# EAGLE board lamloei_node32s3wroom_cp2102_smp_4layers (EAGLE 7.7.0), part 1 of 7
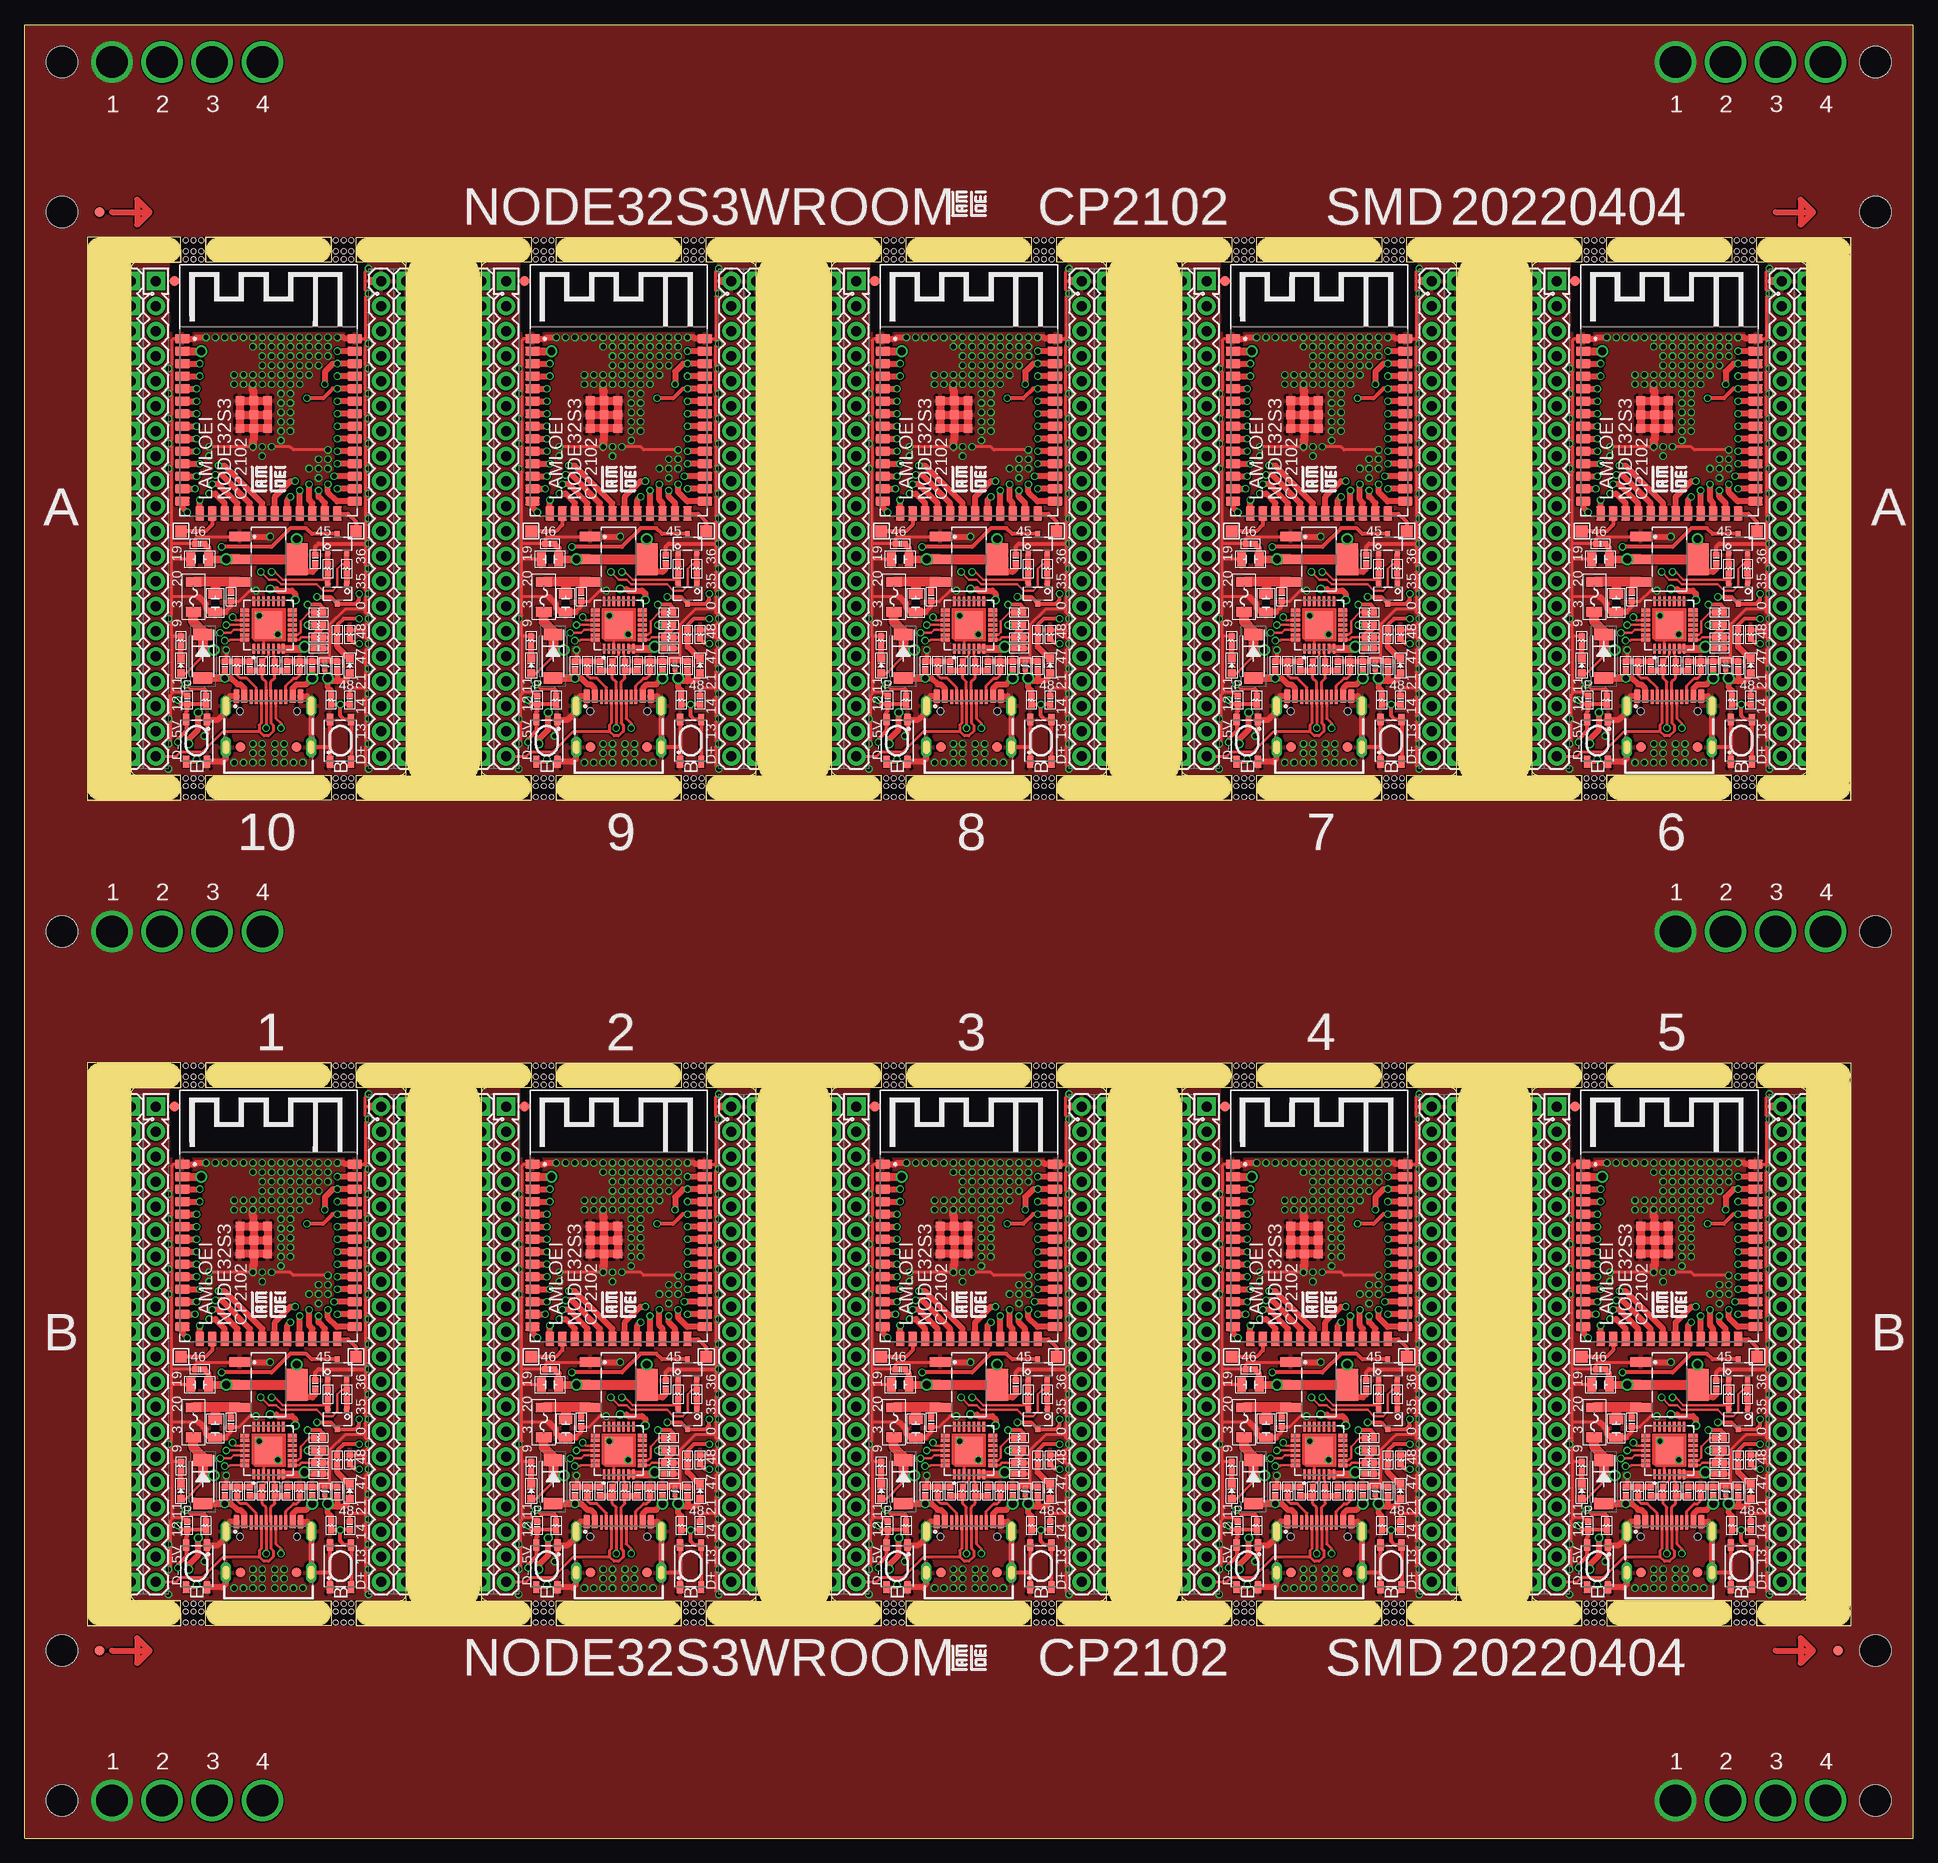
[diagram p0: board, top side]
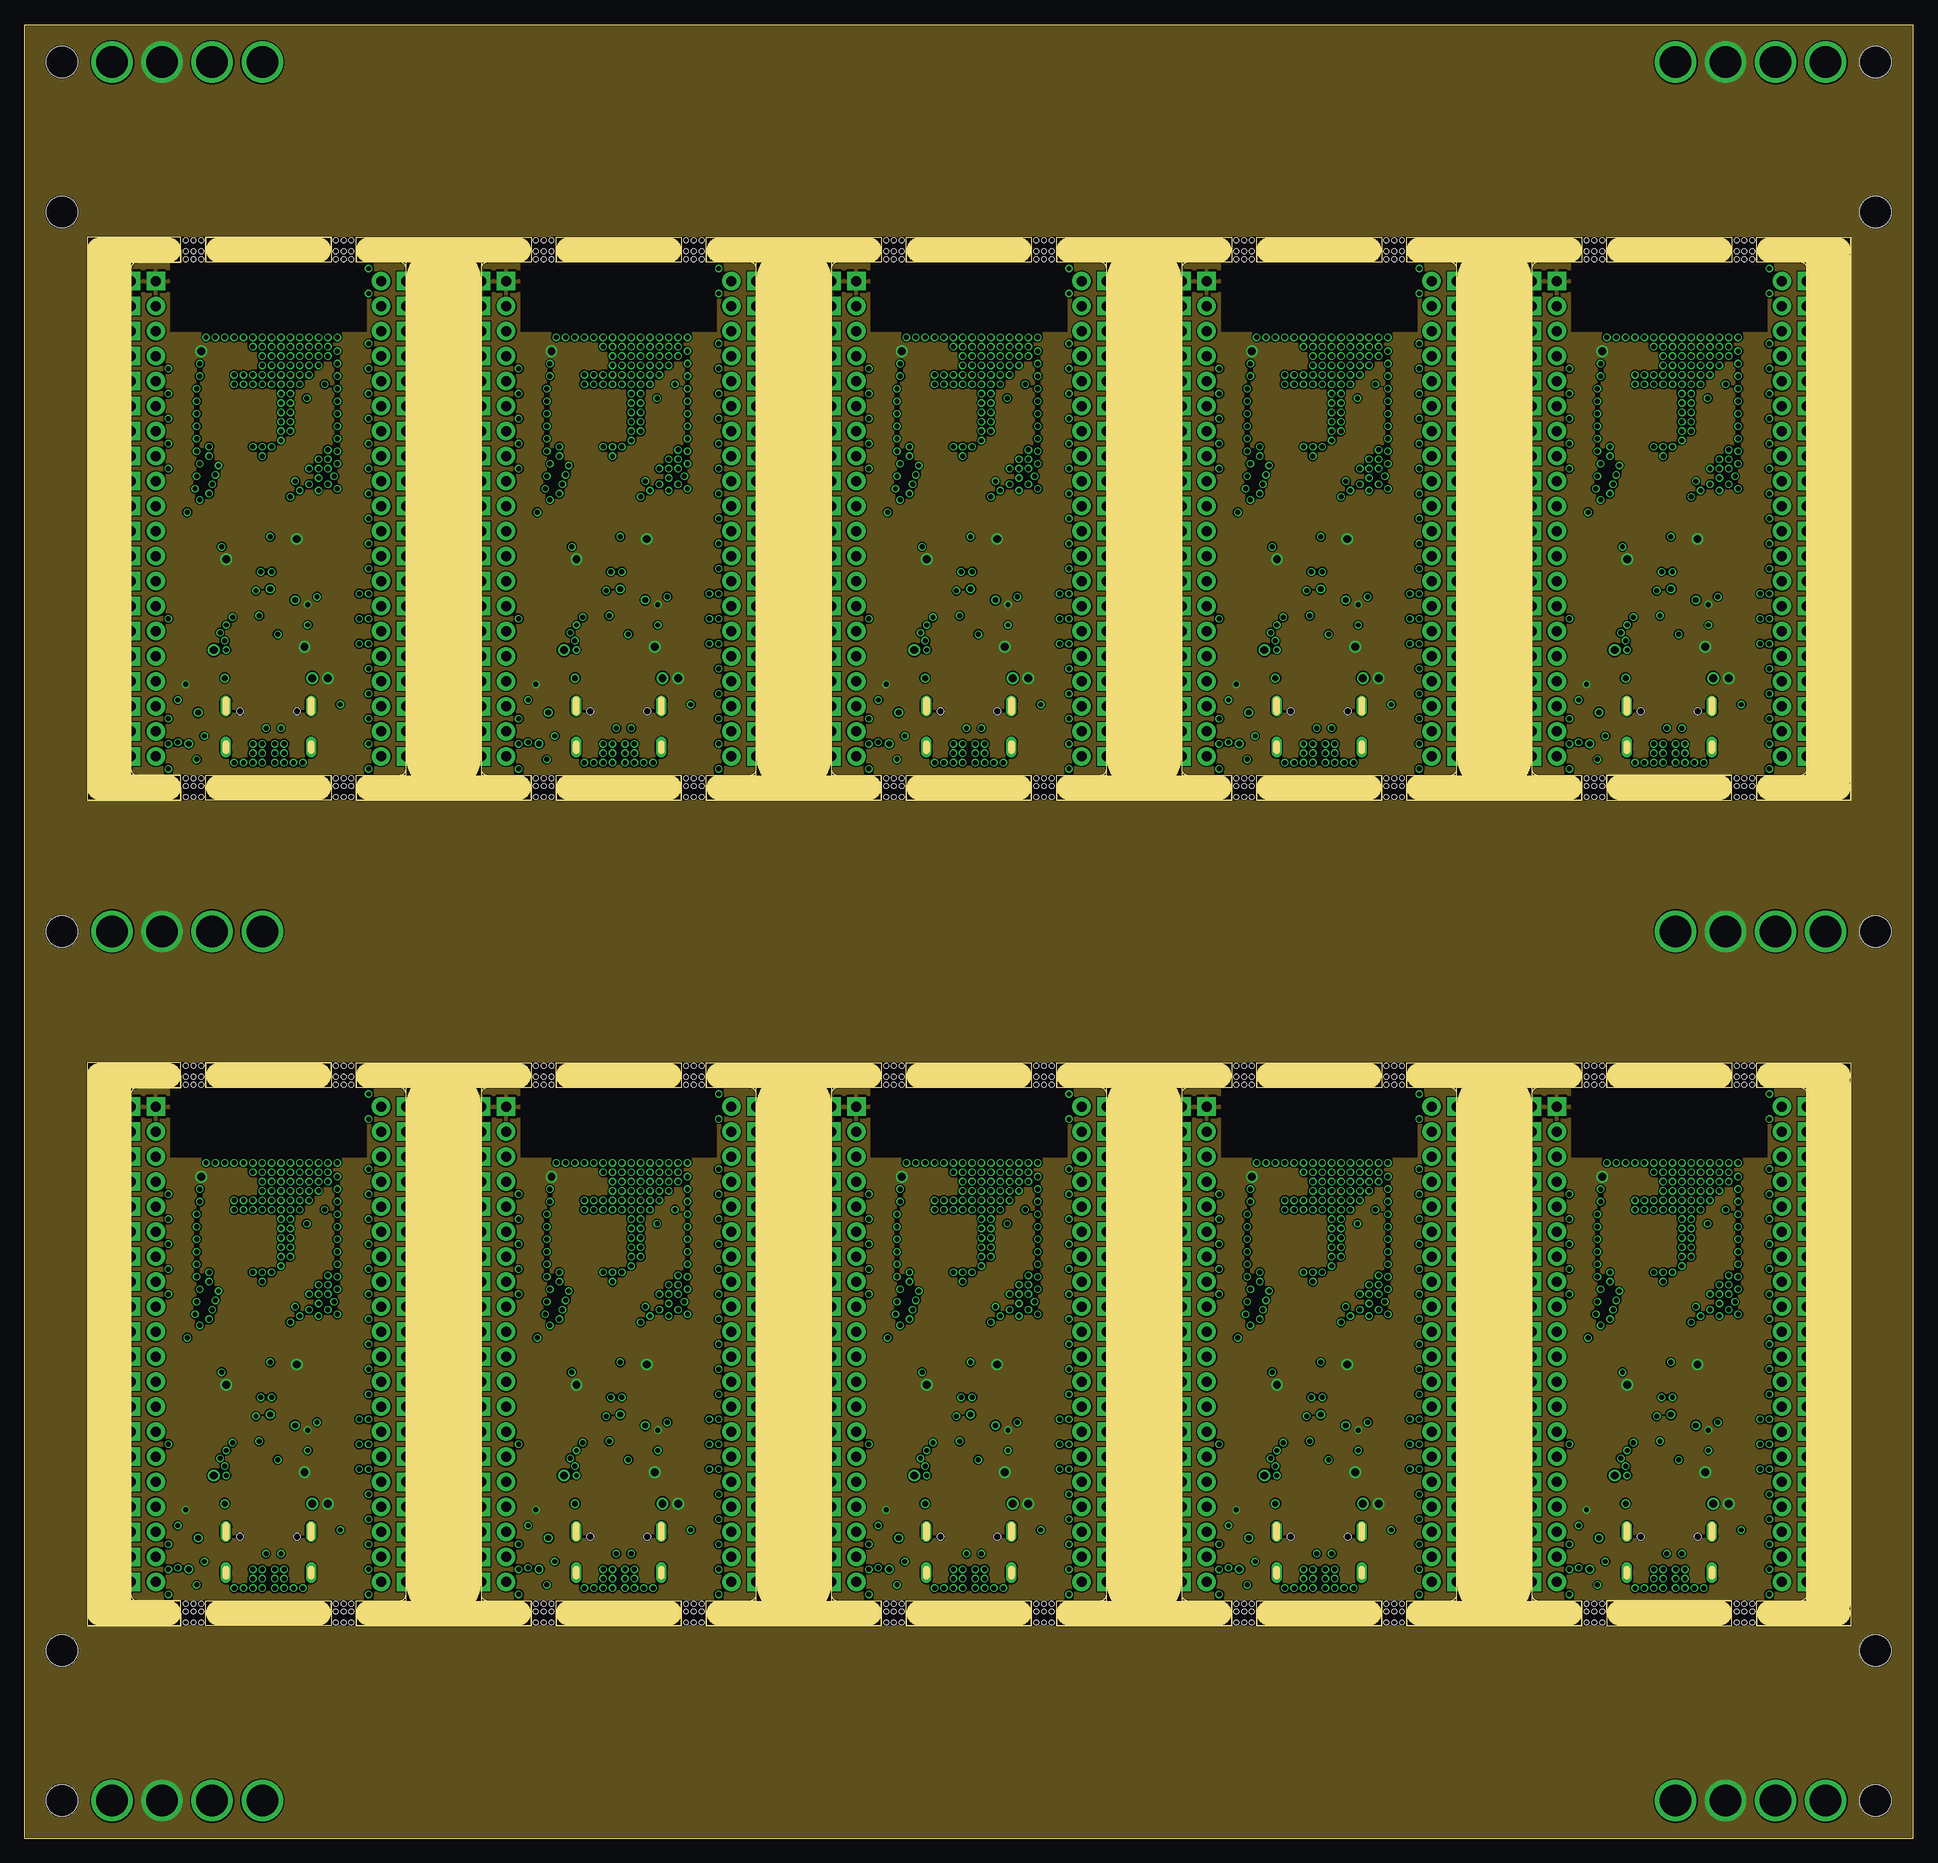
[diagram p1: board, inner layer Route2]
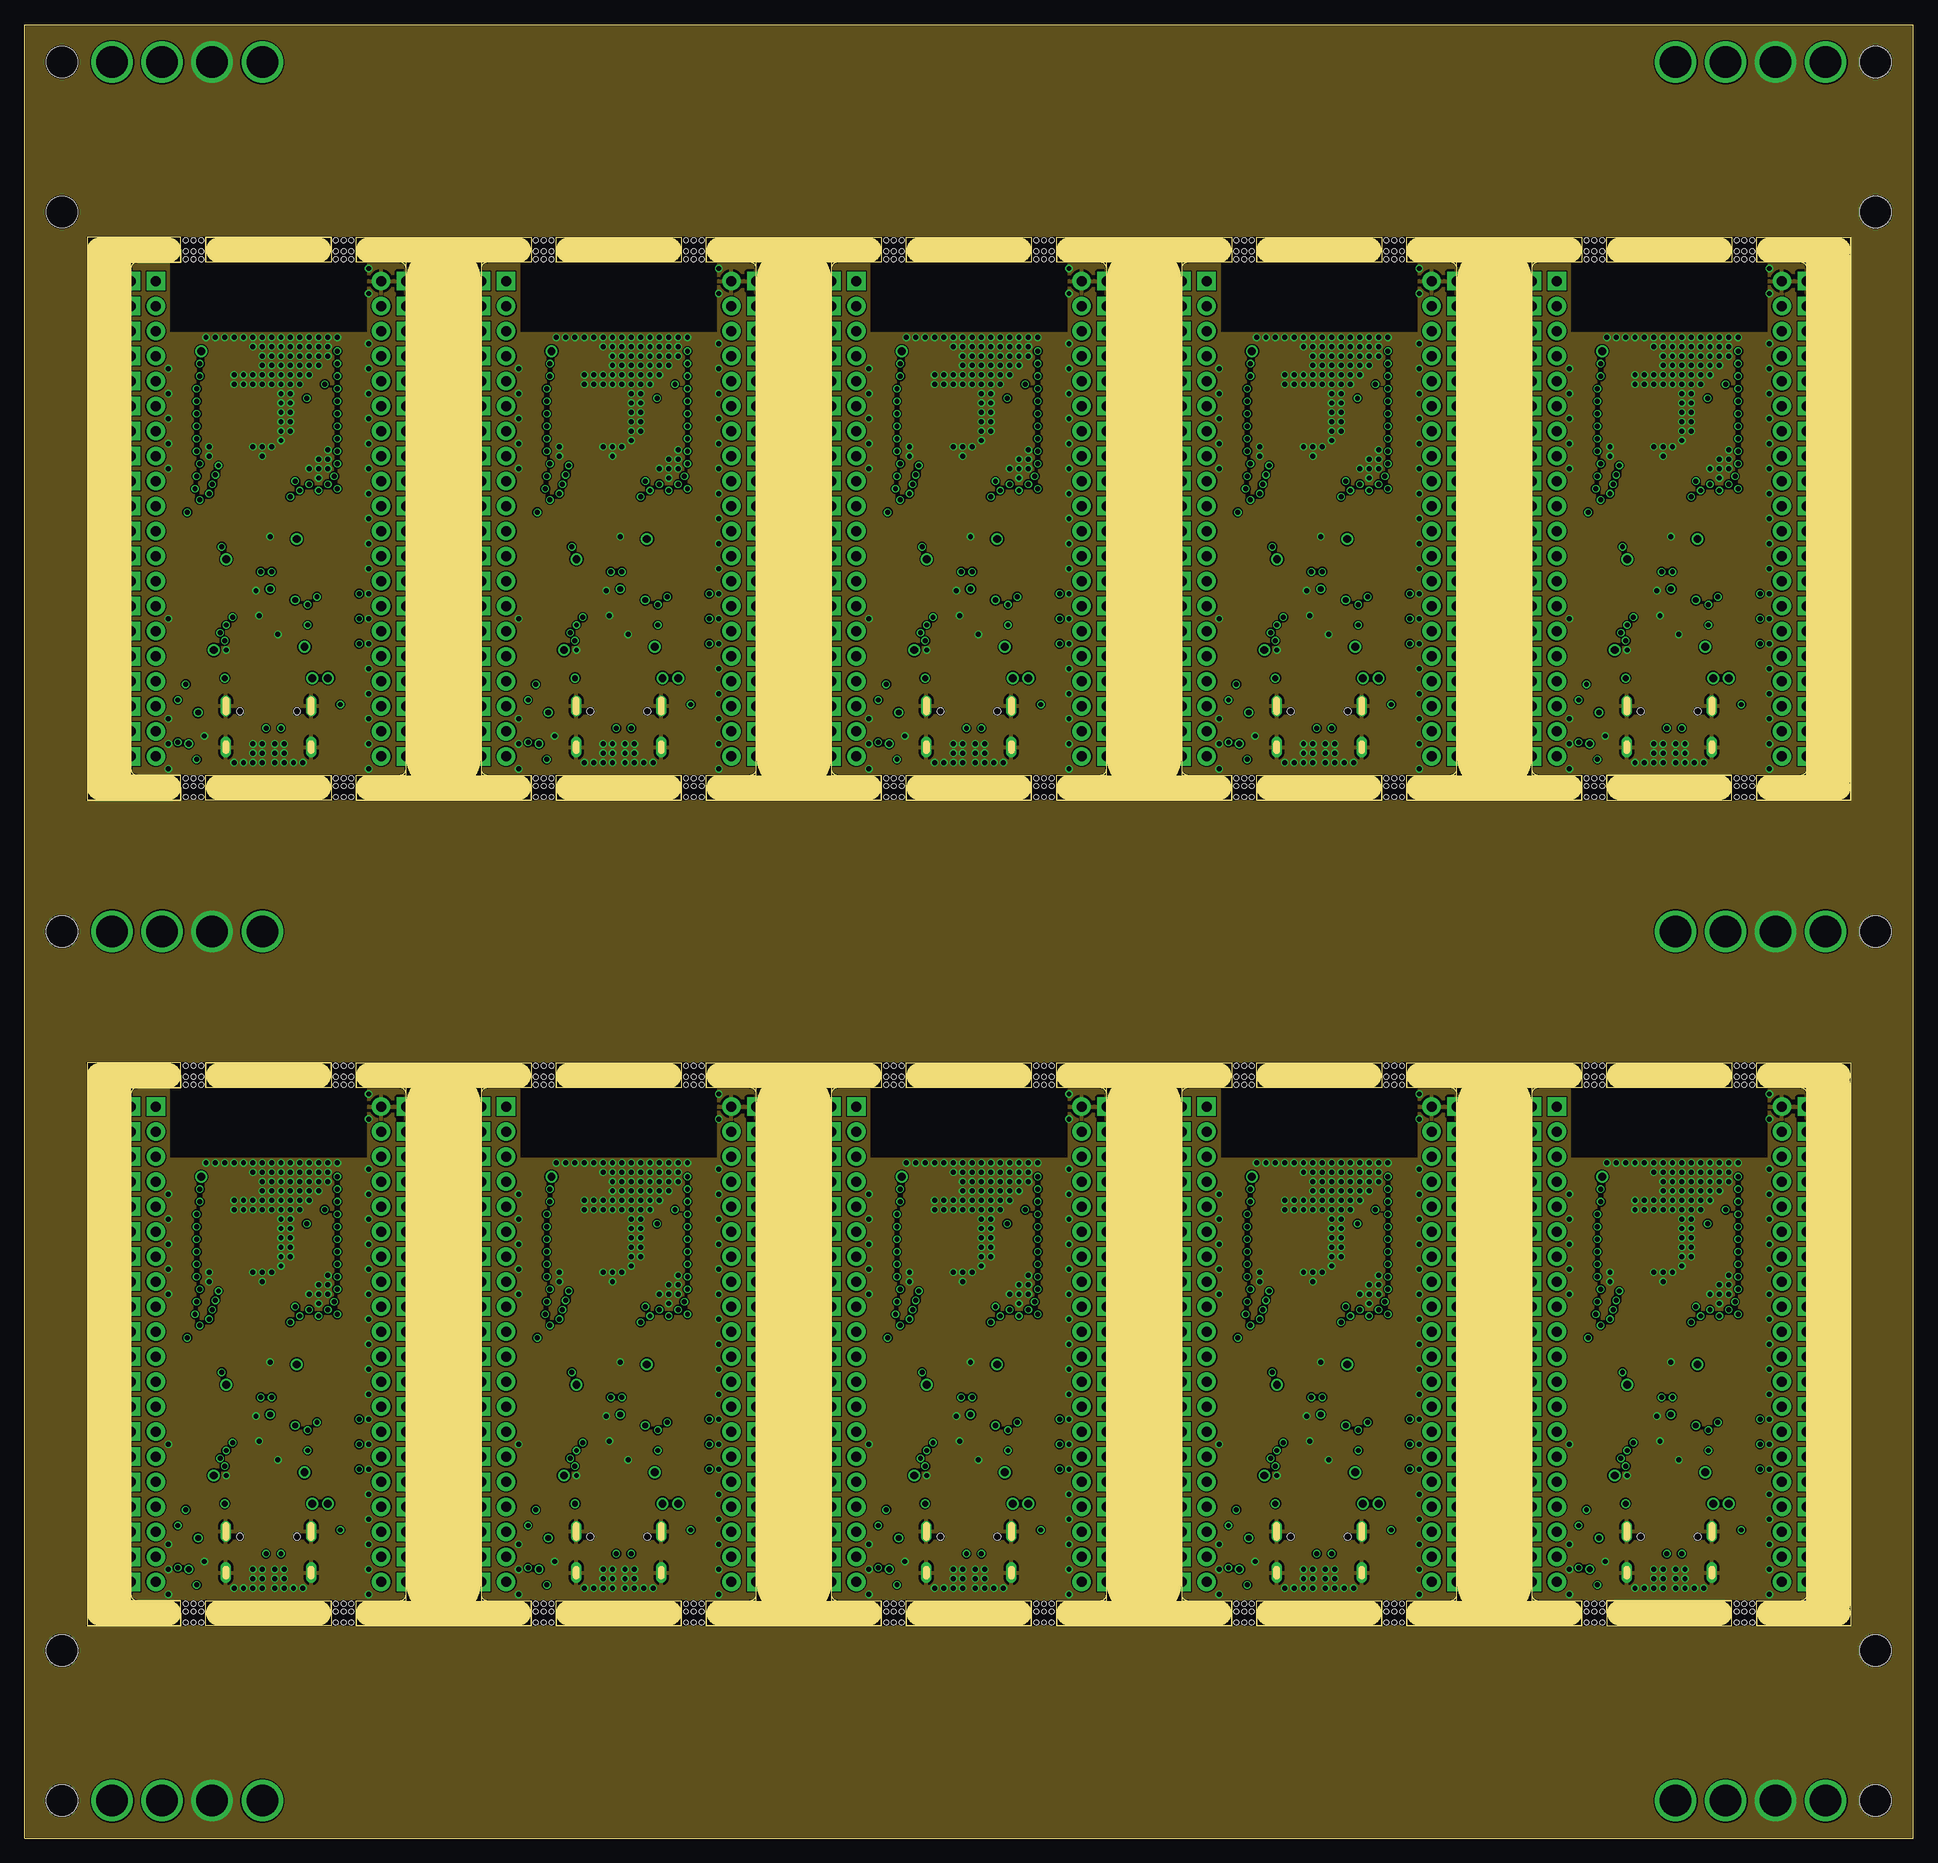
[diagram p2: board, inner layer Route15]
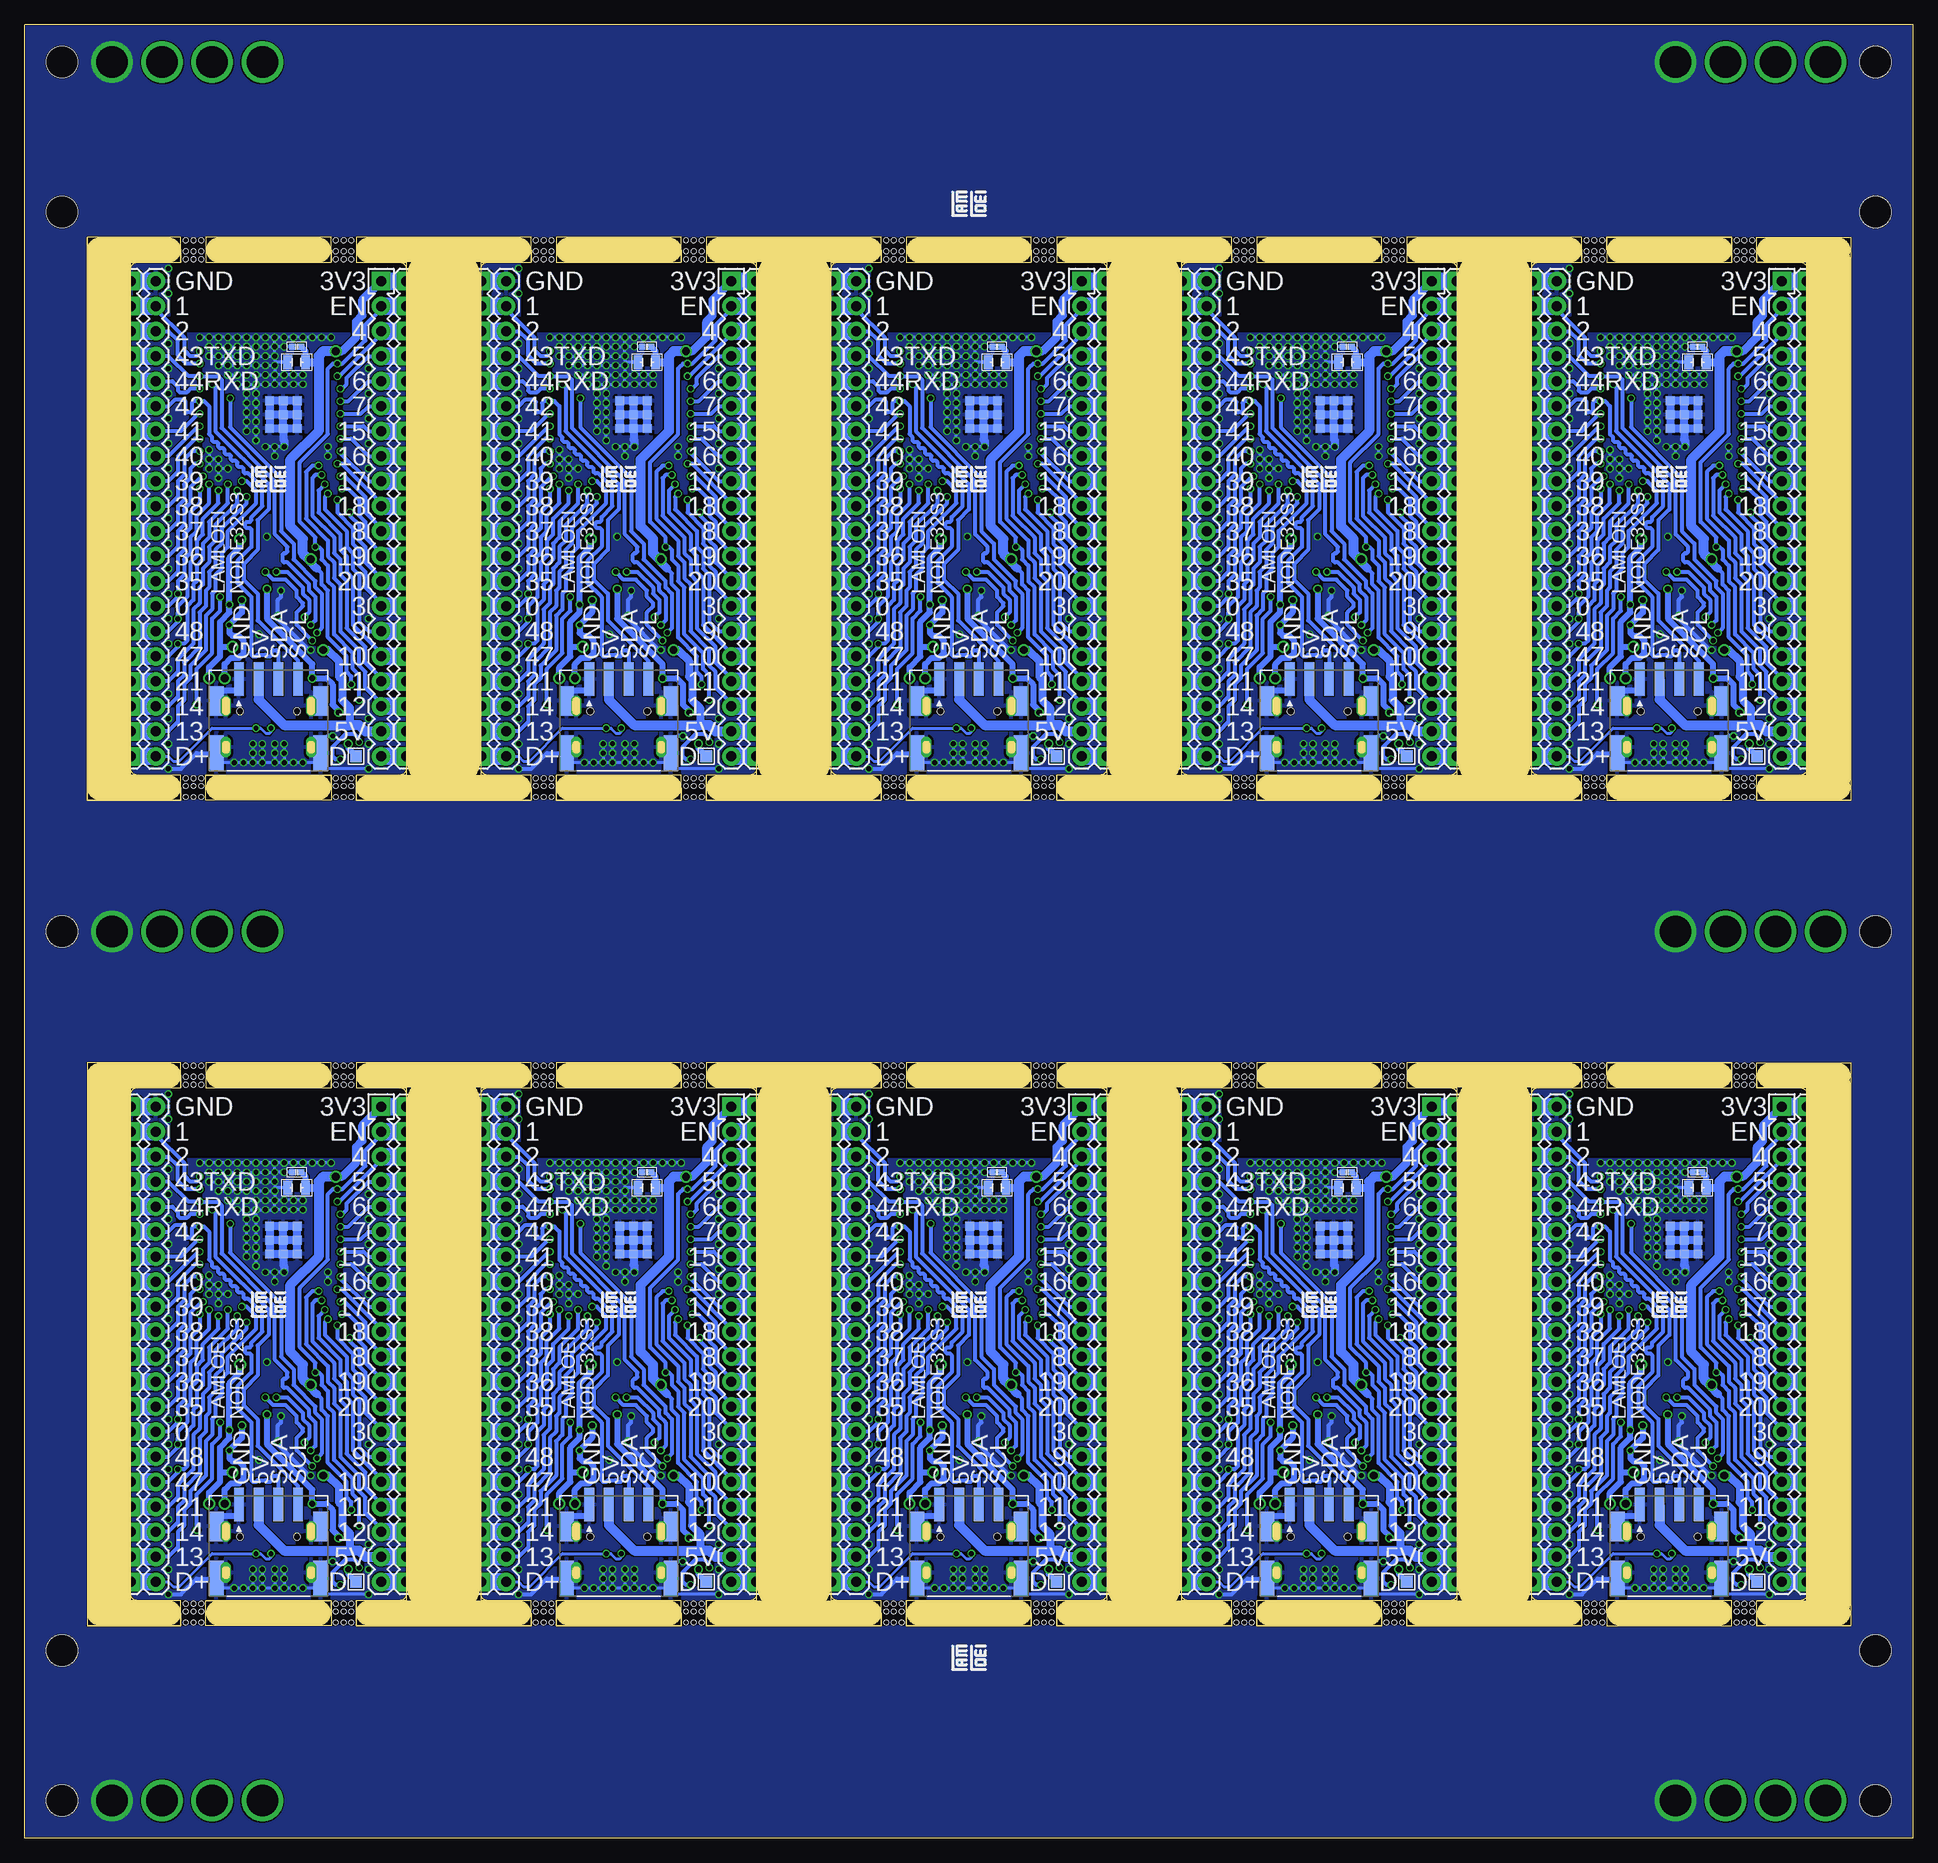
[diagram p3: board, bottom side, seen from below]

Size 191.77 x 184.15 mm. Coordinates in mm from the lower left corner, seen from the top.
Outline: 332 segments
Copper layers (1*2*15*16): Top 0.035559375mm / dielectric 0.17018125mm / Route2 0.01778125mm / dielectric 47mil / Route15 0.01778125mm / dielectric 0.17018125mm / Bottom 0.035559375mm
Design rules "jlcpcb-4-layer": minimum track width 5mil, minimum drill 0.2mm, track to track 0.126490625mm, track to pad 0.126490625mm, pad to pad 0.126490625mm, via to via 0.126490625mm, smd to smd 0mil, copper to edge 0.1mm, drill to drill 5mil, minimum pad ring 4mil, minimum via ring 4mil, stop-mask expansion 3mil, vias tented up to drill 100mil, thermal gap 10mil
Holes 0.5 mm at 16.35,78.42 17.14,78.42 17.94,78.42 31.59,78.42 32.38,78.42 33.18,78.42 17.14,21.91 16.35,21.91 17.94,21.91 31.59,21.91 32.38,21.91 33.18,21.91 51.91,78.42 52.7,78.42 53.5,78.42 67.15,78.42 67.94,78.42 68.74,78.42 52.7,21.91 51.91,21.91 53.5,21.91 67.15,21.91 67.94,21.91 68.74,21.91 88.27,21.91 87.47,21.91 89.06,21.91 102.71,21.91 103.5,21.91 104.3,21.91 87.47,78.42 88.27,78.42 89.06,78.42 102.71,78.42 103.5,78.42 104.3,78.42 123.03,78.42 123.83,78.42 124.62,78.42 138.27,78.42 139.06,78.42 139.86,78.42 158.59,78.42 159.38,78.42 160.18,78.42 173.83,78.42 174.62,78.42 175.42,78.42 123.83,21.91 123.03,21.91 124.62,21.91 138.27,21.91 139.06,21.91 139.86,21.91 159.38,21.91 158.59,21.91 160.18,21.91 173.83,21.91 174.62,21.91 175.42,21.91 17.14,105.73 16.35,105.73 17.94,105.73 31.59,105.73 32.38,105.73 33.18,105.73 52.7,105.73 51.91,105.73 53.5,105.73 67.15,105.73 67.94,105.73 68.74,105.73 88.27,105.73 87.47,105.73 89.06,105.73 102.71,105.73 103.5,105.73 104.3,105.73 123.83,105.73 123.03,105.73 124.62,105.73 138.27,105.73 139.06,105.73 139.86,105.73 159.38,105.73 158.59,105.73 160.18,105.73 173.83,105.73 174.62,105.73 175.42,105.73 16.35,162.24 17.14,162.24 17.94,162.24 31.59,162.24 32.38,162.24 33.18,162.24 51.91,162.24 52.7,162.24 53.5,162.24 67.15,162.24 67.94,162.24 68.74,162.24 87.47,162.24 88.27,162.24 89.06,162.24 102.71,162.24 103.5,162.24 104.3,162.24 123.03,162.24 123.83,162.24 124.62,162.24 138.27,162.24 139.06,162.24 139.86,162.24 158.59,162.24 159.38,162.24 160.18,162.24 173.83,162.24 174.62,162.24 175.42,162.24 17.14,23.81 32.38,23.81 17.14,76.52 32.38,76.52 16.35,23.81 17.94,23.81 31.59,23.81 33.18,23.81 33.18,76.52 31.59,76.52 16.35,76.52 17.94,76.52 16.35,77.31 17.14,77.31 17.94,77.31 31.59,77.31 32.38,77.31 33.18,77.31 31.59,23.02 32.38,23.02 33.18,23.02 16.35,23.02 17.14,23.02 17.94,23.02 52.7,23.81 67.94,23.81 52.7,76.52 67.94,76.52 51.91,23.81 53.5,23.81 67.15,23.81 68.74,23.81 68.74,76.52 67.15,76.52 51.91,76.52 53.5,76.52 51.91,77.31 52.7,77.31 53.5,77.31 67.15,77.31 67.94,77.31 68.74,77.31 67.15,23.02 67.94,23.02 68.74,23.02 51.91,23.02 52.7,23.02 53.5,23.02 88.27,23.81 103.5,23.81 88.27,76.52 103.5,76.52 87.47,23.81 89.06,23.81 102.71,23.81 104.3,23.81 104.3,76.52 102.71,76.52 87.47,76.52 89.06,76.52 87.47,77.31 88.27,77.31 89.06,77.31 102.71,77.31 103.5,77.31 104.3,77.31 102.71,23.02 103.5,23.02 104.3,23.02 87.47,23.02 88.27,23.02 89.06,23.02 123.83,23.81 139.06,23.81 123.83,76.52 139.06,76.52 123.03,23.81 124.62,23.81 138.27,23.81 139.86,23.81 139.86,76.52 138.27,76.52 123.03,76.52 124.62,76.52 123.03,77.31 123.83,77.31 124.62,77.31 138.27,77.31 139.06,77.31 139.86,77.31 138.27,23.02 139.06,23.02 139.86,23.02 123.03,23.02 123.83,23.02 124.62,23.02 159.38,23.81 174.62,23.81 159.38,76.52 174.62,76.52 158.59,23.81 160.18,23.81 173.83,23.81 175.42,23.81 175.42,76.52 173.83,76.52 158.59,76.52 160.18,76.52 158.59,77.31 159.38,77.31 160.18,77.31 173.83,77.31 174.62,77.31 175.42,77.31 173.83,23.02 174.62,23.02 175.42,23.02 158.59,23.02 159.38,23.02 160.18,23.02 159.38,107.63 174.62,107.63 159.38,160.34 174.62,160.34 158.59,107.63 160.18,107.63 173.83,107.63 175.42,107.63 175.42,160.34 173.83,160.34 158.59,160.34 160.18,160.34 158.59,161.13 159.38,161.13 160.18,161.13 173.83,161.13 174.62,161.13 175.42,161.13 173.83,106.84 174.62,106.84 175.42,106.84 158.59,106.84 159.38,106.84 160.18,106.84 123.83,107.63 139.06,107.63 123.83,160.34 139.06,160.34 123.03,107.63 124.62,107.63 138.27,107.63 139.86,107.63 139.86,160.34 138.27,160.34 123.03,160.34 124.62,160.34 123.03,161.13 123.83,161.13 124.62,161.13 138.27,161.13 139.06,161.13 139.86,161.13 138.27,106.84 139.06,106.84 139.86,106.84 123.03,106.84 123.83,106.84 124.62,106.84 88.27,107.63 103.5,107.63 88.27,160.34 103.5,160.34 87.47,107.63 89.06,107.63 102.71,107.63 104.3,107.63 104.3,160.34 102.71,160.34 87.47,160.34 89.06,160.34 87.47,161.13 88.27,161.13 89.06,161.13 102.71,161.13 103.5,161.13 104.3,161.13 102.71,106.84 103.5,106.84 104.3,106.84 87.47,106.84 88.27,106.84 89.06,106.84 52.7,107.63 67.94,107.63 52.7,160.34 67.94,160.34 51.91,107.63 53.5,107.63 67.15,107.63 68.74,107.63 68.74,160.34 67.15,160.34 51.91,160.34 53.5,160.34 51.91,161.13 52.7,161.13 53.5,161.13 67.15,161.13 67.94,161.13 68.74,161.13 67.15,106.84 67.94,106.84 68.74,106.84 51.91,106.84 52.7,106.84 53.5,106.84 17.14,107.63 32.38,107.63 17.14,160.34 32.38,160.34 16.35,107.63 17.94,107.63 31.59,107.63 33.18,107.63 33.18,160.34 31.59,160.34 16.35,160.34 17.94,160.34 16.35,161.13 17.14,161.13 17.94,161.13 31.59,161.13 32.38,161.13 33.18,161.13 31.59,106.84 32.38,106.84 33.18,106.84 16.35,106.84 17.14,106.84 17.94,106.84
Holes 3.2 mm at 3.81,165.1 187.96,165.1 187.96,19.05 3.81,19.05 3.81,3.81 187.96,3.81 3.81,180.34 187.96,180.34 187.96,92.08 3.81,92.08
Milling: 264 lines

## Footprints (pad centres in the part's own frame; a part is rotated, then mirrored left to right if it is on the bottom)
GRM155R70J105KA12D = smd 0.62 x 0.62: 1 -0.45,0; 2 0.45,0
GCM155R71H104KE02D = smd 0.62 x 0.62: 1 -0.45,0; 2 0.45,0
GCM1555C1H470JA16D = smd 0.62 x 0.62: 1 -0.45,0; 2 0.45,0
GCM21BR71H105KA03L = smd 0.9 x 1.4: 1 -0.9,0; 2 0.9,0
PMEG4050EP,115 = smd 1.2 x 1.9: 1 -2.2,0; 2 2.2,0
MF-NSMF050-2 = smd 1 x 1.6: 1 -1.5,0; 2 1.5,0
HEADER-120 = drill 1.016 pad 1.88 square: P1 24.13,0 | drill 1.016 pad 1.88: P2 21.59,0; P3 19.05,0; P4 16.51,0; P5 13.97,0; P6 11.43,0; P7 8.89,0; P8 6.35,0; P9 3.81,0; P10 1.27,0; P11 -1.27,0; P12 -3.81,0; P13 -6.35,0; P14 -8.89,0; P15 -11.43,0; P16 -13.97,0; P17 -16.51,0; P18 -19.05,0; P19 -21.59,0; P20 -24.13,0
HEADER-120' = drill 1.016 pad 1.88: P1 24.13,0; P2 21.59,0; P3 19.05,0; P4 16.51,0; P5 13.97,0; P6 11.43,0; P7 8.89,0; P8 6.35,0; P9 3.81,0; P10 1.27,0; P11 -1.27,0; P12 -3.81,0; P13 -6.35,0; P14 -8.89,0; P15 -11.43,0; P16 -13.97,0; P17 -16.51,0; P18 -19.05,0; P19 -21.59,0; P20 -24.13,0
HEADER-101-SMD = smd 1.2 x 1.2: P$1 0,0
HEADER-120'' = drill 1.016 pad 1.88 square: P1 24.13,0; P2 21.59,0; P3 19.05,0; P4 16.51,0; P5 13.97,0; P6 11.43,0; P7 8.89,0; P8 6.35,0; P9 3.81,0; P10 1.27,0; P11 -1.27,0; P12 -3.81,0; P13 -6.35,0; P14 -8.89,0; P15 -11.43,0; P16 -13.97,0; P17 -16.51,0; P18 -19.05,0; P19 -21.59,0; P20 -24.13,0
A2012WR-S-4P = smd 1 x 3.4: 1 -3,3.7; 2 -1,3.7; 3 1,3.7; 4 3,3.7 | smd 1.5 x 3.6: G1 -5.3,-3.8; G2 5.3,-3.8 | smd 1.5 x 3: G3 -5.3,1.5; G4 5.3,1.5
19-217BHC-ZL1M2RY3T = smd 0.8 x 0.8: 1 -0.75,0; 2 0.75,0
19-213/Y2C-CQ2R2L/3T(CY) = smd 0.8 x 0.8: 1 -0.75,0; 2 0.75,0
BC847B,215 = smd 0.6 x 0.5: B 1,-0.95; C -1,0; E 1,0.95
R0402 = smd 0.62 x 0.62: 1 -0.45,0; 2 0.45,0
K2-1808SN-A4SW-01 = smd 1.2 x 0.65: 1 -2.15,1.075; 2 2.15,1.075; 3 -2.15,-1.075; 4 2.15,-1.075
LXES15AAA1-153 = smd 0.4 x 0.5: 1 -0.4,0; 2 0.4,0
ESP32-S3-WROOM = smd 0.9 x 1.5: 1 -5.26,-8.75; 2 -3.99,-8.75; 3 -2.72,-8.75; 4 -1.45,-8.75; 5 -0.18,-8.75; 6 1.09,-8.75; 7 2.36,-8.75; 8 3.63,-8.75; 9 4.9,-8.75; 10 6.17,-8.75; 11 7.44,-8.75; 12 8.71,-8.75; 13 9.98,-8.75; 14 11.25,-8.75; 27 11.25,8.75; 28 9.98,8.75; 29 8.71,8.75; 30 7.44,8.75; 31 6.17,8.75; 32 4.9,8.75; 33 3.63,8.75; 34 2.36,8.75; 35 1.09,8.75; 36 -0.18,8.75; 37 -1.45,8.75; 38 -2.72,8.75; 39 -3.99,8.75; 40 -5.26,8.75 | smd 0.9 x 0.9: 1.1 1.06,-2.9; 1.2 1.06,-1.5; 1.3 1.06,-0.1; 1.4 2.46,-2.9; 1.5 2.46,-1.5; 1.6 2.46,-0.1; 1.7 3.86,-2.9; 1.8 3.86,-1.5; 1.9 3.86,-0.1 | smd 0.9 x 0.9 bottom: 1.10 1.06,-2.9; 1.11 1.06,-1.5; 1.12 1.06,-0.1; 1.13 2.46,-2.9; 1.14 2.46,-1.5; 1.15 2.46,-0.1; 1.16 3.86,-2.9; 1.17 3.86,-1.5; 1.18 3.86,-0.1 | smd 1.5 x 0.9: 15 12.5,-6.985; 16 12.5,-5.715; 17 12.5,-4.445; 18 12.5,-3.175; 19 12.5,-1.905; 20 12.5,-0.635; 21 12.5,0.635; 22 12.5,1.905; 23 12.5,3.175; 24 12.5,4.445; 25 12.5,5.715; 26 12.5,6.985
CP2102N-A02-GQFN28R = smd 0.95 x 0.29: 1 -2.4,1.5; 2 -2.4,1; 3 -2.4,0.5; 4 -2.4,0; 5 -2.4,-0.5; 6 -2.4,-1; 7 -2.4,-1.5; 15 2.4,-1.5; 16 2.4,-1; 17 2.4,-0.5; 18 2.4,0; 19 2.4,0.5; 20 2.4,1; 21 2.4,1.5 | smd 0.29 x 0.95: 8 -1.5,-2.4; 9 -1,-2.4; 10 -0.5,-2.4; 11 0,-2.4; 12 0.5,-2.4; 13 1,-2.4; 14 1.5,-2.4; 22 1.5,2.4; 23 1,2.4; 24 0.5,2.4; 25 0,2.4; 26 -0.5,2.4; 27 -1,2.4; 28 -1.5,2.4 | smd 2.8 x 2.8: 29 0,0
LM1117MPX-3.3/NOPB = smd 2.15 x 0.95: 1 2.9,-2.3; 2 2.9,0; 3 2.9,2.3 | smd 2.15 x 3.25: 4 -2.9,0
TYPE-C-31-M-12 = smd 0.6 x 1.3: A1B12 3.25,-3.56; A4B9 2.45,-3.56; B1A12 -3.25,-3.56; B4A9 -2.45,-3.56 | smd 0.3 x 1.45: A5 1.25,-3.485; A6 0.25,-3.485; A7 -0.25,-3.485; A8 -1.25,-3.485; B5 -1.75,-3.485; B6 -0.75,-3.485; B7 0.75,-3.485; B8 1.75,-3.485 | drill 0.65 pad 1.05 long: S1 4.32,-2.57; S2 -4.32,-2.57; S3 4.32,1.61; S4 -4.32,1.61 | hole 0.7: 2.89,-2.04; -2.89,-2.04
FIDUCIAL-1X2 = smd 1 x 1: 1 0,0

## Placement (x,y rotation side)
C1  1u  [GRM155R70J105KA12D]  16.51,31.75 270 top
C2  100n  [GCM155R71H104KE02D]  33.02,31.75 270 top
C3  100n  [GCM155R71H104KE02D]  20.32,35.24 270 top
C4  47p  [GCM1555C1H470JA16D]  22.86,35.24 270 top
C5  47p  [GCM1555C1H470JA16D]  26.67,35.24 270 top
C6  100n  [GCM155R71H104KE02D]  29.21,35.24 270 top
C7  100n  [GCM155R71H104KE02D]  31.75,35.24 270 top
C8  100n  [GCM155R71H104KE02D]  29.84,36.99 180 top
C9  22u  [GCM21BR71H105KA03L]  19.37,41.59 90 top
C10  100n  [GCM155R71H104KE02D]  20.95,42.23 90 top
C11  100n  [GCM155R71H104KE02D]  29.53,46.04 270 top
C12  22u  [GCM21BR71H105KA03L]  17.78,46.04 0 top
C13  100n  [GCM155R71H104KE02D]  17.78,47.62 0 top
C14  47p  [GCM1555C1H470JA16D]  62.23,35.24 270 top
C15  47p  [GCM1555C1H470JA16D]  58.42,35.24 270 top
C16  100n  [GCM155R71H104KE02D]  55.88,35.24 270 top
C17  100n  [GCM155R71H104KE02D]  64.77,35.24 270 top
C18  100n  [GCM155R71H104KE02D]  53.34,47.62 0 top
C19  100n  [GCM155R71H104KE02D]  68.58,31.75 270 top
C20  1u  [GRM155R70J105KA12D]  52.07,31.75 270 top
C21  22u  [GCM21BR71H105KA03L]  54.93,41.59 90 top
C22  100n  [GCM155R71H104KE02D]  56.52,42.23 90 top
C23  22u  [GCM21BR71H105KA03L]  53.34,46.04 0 top
C24  100n  [GCM155R71H104KE02D]  67.31,35.24 270 top
C25  100n  [GCM155R71H104KE02D]  65.09,46.04 270 top
C26  100n  [GCM155R71H104KE02D]  65.41,36.99 180 top
C27  47p  [GCM1555C1H470JA16D]  97.79,35.24 270 top
C28  47p  [GCM1555C1H470JA16D]  93.98,35.24 270 top
C29  100n  [GCM155R71H104KE02D]  91.44,35.24 270 top
C30  100n  [GCM155R71H104KE02D]  100.33,35.24 270 top
C31  100n  [GCM155R71H104KE02D]  88.9,47.62 0 top
C32  100n  [GCM155R71H104KE02D]  104.14,31.75 270 top
C33  1u  [GRM155R70J105KA12D]  87.63,31.75 270 top
C34  22u  [GCM21BR71H105KA03L]  90.49,41.59 90 top
C35  100n  [GCM155R71H104KE02D]  92.08,42.23 90 top
C36  22u  [GCM21BR71H105KA03L]  88.9,46.04 0 top
C37  100n  [GCM155R71H104KE02D]  102.87,35.24 270 top
C38  100n  [GCM155R71H104KE02D]  100.65,46.04 270 top
C39  100n  [GCM155R71H104KE02D]  100.97,36.99 180 top
C40  47p  [GCM1555C1H470JA16D]  133.35,35.24 270 top
C41  47p  [GCM1555C1H470JA16D]  129.54,35.24 270 top
C42  100n  [GCM155R71H104KE02D]  127,35.24 270 top
C43  100n  [GCM155R71H104KE02D]  135.89,35.24 270 top
C44  100n  [GCM155R71H104KE02D]  124.46,47.62 0 top
C45  100n  [GCM155R71H104KE02D]  139.7,31.75 270 top
C46  1u  [GRM155R70J105KA12D]  123.19,31.75 270 top
C47  22u  [GCM21BR71H105KA03L]  126.05,41.59 90 top
C48  100n  [GCM155R71H104KE02D]  127.64,42.23 90 top
C49  22u  [GCM21BR71H105KA03L]  124.46,46.04 0 top
C50  100n  [GCM155R71H104KE02D]  138.43,35.24 270 top
C51  100n  [GCM155R71H104KE02D]  136.21,46.04 270 top
C52  100n  [GCM155R71H104KE02D]  136.53,36.99 180 top
C53  47p  [GCM1555C1H470JA16D]  168.91,35.24 270 top
C54  47p  [GCM1555C1H470JA16D]  165.1,35.24 270 top
C55  100n  [GCM155R71H104KE02D]  162.56,35.24 270 top
C56  100n  [GCM155R71H104KE02D]  171.45,35.24 270 top
C57  100n  [GCM155R71H104KE02D]  160.02,47.62 0 top
C58  100n  [GCM155R71H104KE02D]  175.26,31.75 270 top
C59  1u  [GRM155R70J105KA12D]  158.75,31.75 270 top
C60  22u  [GCM21BR71H105KA03L]  161.61,41.59 90 top
C61  100n  [GCM155R71H104KE02D]  163.19,42.23 90 top
C62  22u  [GCM21BR71H105KA03L]  160.02,46.04 0 top
C63  100n  [GCM155R71H104KE02D]  173.99,35.24 270 top
C64  100n  [GCM155R71H104KE02D]  171.77,46.04 270 top
C65  100n  [GCM155R71H104KE02D]  172.09,36.99 180 top
C66  47p  [GCM1555C1H470JA16D]  168.91,119.06 270 top
C67  47p  [GCM1555C1H470JA16D]  165.1,119.06 270 top
C68  100n  [GCM155R71H104KE02D]  162.56,119.06 270 top
C69  100n  [GCM155R71H104KE02D]  171.45,119.06 270 top
C70  100n  [GCM155R71H104KE02D]  160.02,131.44 0 top
C71  100n  [GCM155R71H104KE02D]  175.26,115.57 270 top
C72  1u  [GRM155R70J105KA12D]  158.75,115.57 270 top
C73  22u  [GCM21BR71H105KA03L]  161.61,125.41 90 top
C74  100n  [GCM155R71H104KE02D]  163.19,126.05 90 top
C75  22u  [GCM21BR71H105KA03L]  160.02,129.86 0 top
C76  100n  [GCM155R71H104KE02D]  173.99,119.06 270 top
C77  100n  [GCM155R71H104KE02D]  171.77,129.86 270 top
C78  100n  [GCM155R71H104KE02D]  172.09,120.81 180 top
C79  47p  [GCM1555C1H470JA16D]  133.35,119.06 270 top
C80  47p  [GCM1555C1H470JA16D]  129.54,119.06 270 top
C81  100n  [GCM155R71H104KE02D]  127,119.06 270 top
C82  100n  [GCM155R71H104KE02D]  135.89,119.06 270 top
C83  100n  [GCM155R71H104KE02D]  124.46,131.44 0 top
C84  100n  [GCM155R71H104KE02D]  139.7,115.57 270 top
C85  1u  [GRM155R70J105KA12D]  123.19,115.57 270 top
C86  22u  [GCM21BR71H105KA03L]  126.05,125.41 90 top
C87  100n  [GCM155R71H104KE02D]  127.64,126.05 90 top
C88  22u  [GCM21BR71H105KA03L]  124.46,129.86 0 top
C89  100n  [GCM155R71H104KE02D]  138.43,119.06 270 top
C90  100n  [GCM155R71H104KE02D]  136.21,129.86 270 top
C91  100n  [GCM155R71H104KE02D]  136.53,120.81 180 top
C92  47p  [GCM1555C1H470JA16D]  97.79,119.06 270 top
C93  47p  [GCM1555C1H470JA16D]  93.98,119.06 270 top
C94  100n  [GCM155R71H104KE02D]  91.44,119.06 270 top
C95  100n  [GCM155R71H104KE02D]  100.33,119.06 270 top
C96  100n  [GCM155R71H104KE02D]  88.9,131.44 0 top
C97  100n  [GCM155R71H104KE02D]  104.14,115.57 270 top
C98  1u  [GRM155R70J105KA12D]  87.63,115.57 270 top
C99  22u  [GCM21BR71H105KA03L]  90.49,125.41 90 top
C100  100n  [GCM155R71H104KE02D]  92.08,126.05 90 top
C101  22u  [GCM21BR71H105KA03L]  88.9,129.86 0 top
C102  100n  [GCM155R71H104KE02D]  102.87,119.06 270 top
C103  100n  [GCM155R71H104KE02D]  100.65,129.86 270 top
C104  100n  [GCM155R71H104KE02D]  100.97,120.81 180 top
C105  47p  [GCM1555C1H470JA16D]  62.23,119.06 270 top
C106  47p  [GCM1555C1H470JA16D]  58.42,119.06 270 top
C107  100n  [GCM155R71H104KE02D]  55.88,119.06 270 top
C108  100n  [GCM155R71H104KE02D]  64.77,119.06 270 top
C109  100n  [GCM155R71H104KE02D]  53.34,131.44 0 top
C110  100n  [GCM155R71H104KE02D]  68.58,115.57 270 top
C111  1u  [GRM155R70J105KA12D]  52.07,115.57 270 top
C112  22u  [GCM21BR71H105KA03L]  54.93,125.41 90 top
C113  100n  [GCM155R71H104KE02D]  56.52,126.05 90 top
C114  22u  [GCM21BR71H105KA03L]  53.34,129.86 0 top
C115  100n  [GCM155R71H104KE02D]  67.31,119.06 270 top
C116  100n  [GCM155R71H104KE02D]  65.09,129.86 270 top
C117  100n  [GCM155R71H104KE02D]  65.41,120.81 180 top
C118  47p  [GCM1555C1H470JA16D]  26.67,119.06 270 top
C119  47p  [GCM1555C1H470JA16D]  22.86,119.06 270 top
C120  100n  [GCM155R71H104KE02D]  20.32,119.06 270 top
C121  100n  [GCM155R71H104KE02D]  29.21,119.06 270 top
C122  100n  [GCM155R71H104KE02D]  17.78,131.44 0 top
C123  100n  [GCM155R71H104KE02D]  33.02,115.57 270 top
C124  1u  [GRM155R70J105KA12D]  16.51,115.57 270 top
C125  22u  [GCM21BR71H105KA03L]  19.37,125.41 90 top
C126  100n  [GCM155R71H104KE02D]  20.95,126.05 90 top
C127  22u  [GCM21BR71H105KA03L]  17.78,129.86 0 top
C128  100n  [GCM155R71H104KE02D]  31.75,119.06 270 top
C129  100n  [GCM155R71H104KE02D]  29.53,129.86 270 top
C130  100n  [GCM155R71H104KE02D]  29.84,120.81 180 top
CB1  22u  [GCM21BR71H105KA03L]  21.91,66.04 0 bottom
CB2  100n  [GCM155R71H104KE02D]  21.91,67.63 0 bottom
CB3  22u  [GCM21BR71H105KA03L]  57.47,66.04 0 bottom
CB4  100n  [GCM155R71H104KE02D]  57.47,67.63 0 bottom
CB5  22u  [GCM21BR71H105KA03L]  93.03,66.04 0 bottom
CB6  100n  [GCM155R71H104KE02D]  93.03,67.63 0 bottom
CB7  22u  [GCM21BR71H105KA03L]  128.59,66.04 0 bottom
CB8  100n  [GCM155R71H104KE02D]  128.59,67.63 0 bottom
CB9  22u  [GCM21BR71H105KA03L]  164.15,66.04 0 bottom
CB10  100n  [GCM155R71H104KE02D]  164.15,67.63 0 bottom
CB11  22u  [GCM21BR71H105KA03L]  164.15,149.86 0 bottom
CB12  100n  [GCM155R71H104KE02D]  164.15,151.45 0 bottom
CB13  22u  [GCM21BR71H105KA03L]  128.59,149.86 0 bottom
CB14  100n  [GCM155R71H104KE02D]  128.59,151.45 0 bottom
CB15  22u  [GCM21BR71H105KA03L]  93.03,149.86 0 bottom
CB16  100n  [GCM155R71H104KE02D]  93.03,151.45 0 bottom
CB17  22u  [GCM21BR71H105KA03L]  57.47,149.86 0 bottom
CB18  100n  [GCM155R71H104KE02D]  57.47,151.45 0 bottom
CB19  22u  [GCM21BR71H105KA03L]  21.91,149.86 0 bottom
CB20  100n  [GCM155R71H104KE02D]  21.91,151.45 0 bottom
D1  [PMEG4050EP,115]  18.1,36.2 270 top
D2  [PMEG4050EP,115]  53.66,36.2 270 top
D3  [PMEG4050EP,115]  89.22,36.2 270 top
D4  [PMEG4050EP,115]  124.78,36.2 270 top
D5  [PMEG4050EP,115]  160.34,36.2 270 top
D6  [PMEG4050EP,115]  160.34,120.02 270 top
D7  [PMEG4050EP,115]  124.78,120.02 270 top
D8  [PMEG4050EP,115]  89.22,120.02 270 top
D9  [PMEG4050EP,115]  53.66,120.02 270 top
D10  [PMEG4050EP,115]  18.1,120.02 270 top
F1  [MF-NSMF050-2]  17.14,42.23 90 top
F2  [MF-NSMF050-2]  52.7,42.23 90 top
F3  [MF-NSMF050-2]  88.27,42.23 90 top
F4  [MF-NSMF050-2]  123.83,42.23 90 top
F5  [MF-NSMF050-2]  159.38,42.23 90 top
F6  [MF-NSMF050-2]  159.38,126.05 90 top
F7  [MF-NSMF050-2]  123.83,126.05 90 top
F8  [MF-NSMF050-2]  88.27,126.05 90 top
F9  [MF-NSMF050-2]  52.7,126.05 90 top
F10  [MF-NSMF050-2]  17.14,126.05 90 top
J1  1 20P 2.54MM  [HEADER-120]  13.34,50.16 90 top
J2  1 20P 2.54MM  [HEADER-120']  36.2,50.16 90 top
J3  HEADER-101-SMD  [HEADER-101-SMD]  15.88,48.9 0 top
J4  HEADER-101-SMD  [HEADER-101-SMD]  33.66,48.9 0 top
J5  HEADER-120  [HEADER-120'']  10.79,50.16 90 top
J6  HEADER-120  [HEADER-120'']  38.73,50.16 90 top
J7  1 20P 2.54MM  [HEADER-120]  48.9,50.16 90 top
J8  1 20P 2.54MM  [HEADER-120']  71.75,50.16 90 top
J9  HEADER-101-SMD  [HEADER-101-SMD]  51.44,48.9 0 top
J10  HEADER-101-SMD  [HEADER-101-SMD]  69.22,48.9 0 top
J11  HEADER-120  [HEADER-120'']  46.35,50.16 90 top
J12  HEADER-120  [HEADER-120'']  74.3,50.16 90 top
J13  1 20P 2.54MM  [HEADER-120]  84.45,50.16 90 top
J14  1 20P 2.54MM  [HEADER-120']  107.31,50.16 90 top
J15  HEADER-101-SMD  [HEADER-101-SMD]  87,48.9 0 top
J16  HEADER-101-SMD  [HEADER-101-SMD]  104.78,48.9 0 top
J17  HEADER-120  [HEADER-120'']  81.92,50.16 90 top
J18  HEADER-120  [HEADER-120'']  109.86,50.16 90 top
J19  1 20P 2.54MM  [HEADER-120]  120.02,50.16 90 top
J20  1 20P 2.54MM  [HEADER-120']  142.88,50.16 90 top
J21  HEADER-101-SMD  [HEADER-101-SMD]  122.56,48.9 0 top
J22  HEADER-101-SMD  [HEADER-101-SMD]  140.34,48.9 0 top
J23  HEADER-120  [HEADER-120'']  117.47,50.16 90 top
J24  HEADER-120  [HEADER-120'']  145.41,50.16 90 top
J25  1 20P 2.54MM  [HEADER-120]  155.57,50.16 90 top
J26  1 20P 2.54MM  [HEADER-120']  178.44,50.16 90 top
J27  HEADER-101-SMD  [HEADER-101-SMD]  158.12,48.9 0 top
J28  HEADER-101-SMD  [HEADER-101-SMD]  175.9,48.9 0 top
J29  HEADER-120  [HEADER-120'']  153.03,50.16 90 top
J30  HEADER-120  [HEADER-120'']  180.97,50.16 90 top
J31  1 20P 2.54MM  [HEADER-120]  155.57,133.99 90 top
J32  1 20P 2.54MM  [HEADER-120']  178.44,133.99 90 top
J33  HEADER-101-SMD  [HEADER-101-SMD]  158.12,132.72 0 top
J34  HEADER-101-SMD  [HEADER-101-SMD]  175.9,132.72 0 top
J35  HEADER-120  [HEADER-120'']  153.03,133.99 90 top
J36  HEADER-120  [HEADER-120'']  180.97,133.99 90 top
J37  1 20P 2.54MM  [HEADER-120]  120.02,133.99 90 top
J38  1 20P 2.54MM  [HEADER-120']  142.88,133.99 90 top
J39  HEADER-101-SMD  [HEADER-101-SMD]  122.56,132.72 0 top
J40  HEADER-101-SMD  [HEADER-101-SMD]  140.34,132.72 0 top
J41  HEADER-120  [HEADER-120'']  117.47,133.99 90 top
J42  HEADER-120  [HEADER-120'']  145.41,133.99 90 top
J43  1 20P 2.54MM  [HEADER-120]  84.45,133.99 90 top
J44  1 20P 2.54MM  [HEADER-120']  107.31,133.99 90 top
J45  HEADER-101-SMD  [HEADER-101-SMD]  87,132.72 0 top
J46  HEADER-101-SMD  [HEADER-101-SMD]  104.78,132.72 0 top
J47  HEADER-120  [HEADER-120'']  81.92,133.99 90 top
J48  HEADER-120  [HEADER-120'']  109.86,133.99 90 top
J49  1 20P 2.54MM  [HEADER-120]  48.9,133.99 90 top
J50  1 20P 2.54MM  [HEADER-120']  71.75,133.99 90 top
J51  HEADER-101-SMD  [HEADER-101-SMD]  51.44,132.72 0 top
J52  HEADER-101-SMD  [HEADER-101-SMD]  69.22,132.72 0 top
J53  HEADER-120  [HEADER-120'']  46.35,133.99 90 top
J54  HEADER-120  [HEADER-120'']  74.3,133.99 90 top
J55  1 20P 2.54MM  [HEADER-120]  13.34,133.99 90 top
J56  1 20P 2.54MM  [HEADER-120']  36.2,133.99 90 top
J57  HEADER-101-SMD  [HEADER-101-SMD]  15.88,132.72 0 top
J58  HEADER-101-SMD  [HEADER-101-SMD]  33.66,132.72 0 top
J59  HEADER-120  [HEADER-120'']  10.79,133.99 90 top
J60  HEADER-120  [HEADER-120'']  38.73,133.99 90 top
JB1  1 4P 2.0MM  [A2012WR-S-4P]  24.77,30.16 0 bottom
JB2  HEADER-101-SMD  [HEADER-101-SMD]  15.88,26.04 0 bottom
JB3  1 4P 2.0MM  [A2012WR-S-4P]  60.33,30.16 0 bottom
JB4  HEADER-101-SMD  [HEADER-101-SMD]  51.44,26.04 0 bottom
JB5  1 4P 2.0MM  [A2012WR-S-4P]  95.89,30.16 0 bottom
JB6  HEADER-101-SMD  [HEADER-101-SMD]  87,26.04 0 bottom
JB7  1 4P 2.0MM  [A2012WR-S-4P]  131.44,30.16 0 bottom
JB8  HEADER-101-SMD  [HEADER-101-SMD]  122.56,26.04 0 bottom
JB9  1 4P 2.0MM  [A2012WR-S-4P]  167,30.16 0 bottom
JB10  HEADER-101-SMD  [HEADER-101-SMD]  158.12,26.04 0 bottom
JB11  1 4P 2.0MM  [A2012WR-S-4P]  167,113.98 0 bottom
JB12  HEADER-101-SMD  [HEADER-101-SMD]  158.12,109.86 0 bottom
JB13  1 4P 2.0MM  [A2012WR-S-4P]  131.44,113.98 0 bottom
JB14  HEADER-101-SMD  [HEADER-101-SMD]  122.56,109.86 0 bottom
JB15  1 4P 2.0MM  [A2012WR-S-4P]  95.89,113.98 0 bottom
JB16  HEADER-101-SMD  [HEADER-101-SMD]  87,109.86 0 bottom
JB17  1 4P 2.0MM  [A2012WR-S-4P]  60.33,113.98 0 bottom
JB18  HEADER-101-SMD  [HEADER-101-SMD]  51.44,109.86 0 bottom
JB19  1 4P 2.0MM  [A2012WR-S-4P]  24.77,113.98 0 bottom
JB20  HEADER-101-SMD  [HEADER-101-SMD]  15.88,109.86 0 bottom
LED1  BLUE  [19-217BHC-ZL1M2RY3T]  15.88,35.24 270 top
LED2  YELLOW  [19-213/Y2C-CQ2R2L/3T(CY)]  33.02,35.24 270 top
LED3  BLUE  [19-217BHC-ZL1M2RY3T]  51.44,35.24 270 top
LED4  YELLOW  [19-213/Y2C-CQ2R2L/3T(CY)]  68.58,35.24 270 top
LED5  BLUE  [19-217BHC-ZL1M2RY3T]  87,35.24 270 top
LED6  YELLOW  [19-213/Y2C-CQ2R2L/3T(CY)]  104.14,35.24 270 top
LED7  BLUE  [19-217BHC-ZL1M2RY3T]  122.56,35.24 270 top
LED8  YELLOW  [19-213/Y2C-CQ2R2L/3T(CY)]  139.7,35.24 270 top
LED9  BLUE  [19-217BHC-ZL1M2RY3T]  158.12,35.24 270 top
LED10  YELLOW  [19-213/Y2C-CQ2R2L/3T(CY)]  175.26,35.24 270 top
LED11  BLUE  [19-217BHC-ZL1M2RY3T]  158.12,119.06 270 top
LED12  YELLOW  [19-213/Y2C-CQ2R2L/3T(CY)]  175.26,119.06 270 top
LED13  BLUE  [19-217BHC-ZL1M2RY3T]  122.56,119.06 270 top
LED14  YELLOW  [19-213/Y2C-CQ2R2L/3T(CY)]  139.7,119.06 270 top
LED15  BLUE  [19-217BHC-ZL1M2RY3T]  87,119.06 270 top
LED16  YELLOW  [19-213/Y2C-CQ2R2L/3T(CY)]  104.14,119.06 270 top
LED17  BLUE  [19-217BHC-ZL1M2RY3T]  51.44,119.06 270 top
LED18  YELLOW  [19-213/Y2C-CQ2R2L/3T(CY)]  68.58,119.06 270 top
LED19  BLUE  [19-217BHC-ZL1M2RY3T]  15.88,119.06 270 top
LED20  YELLOW  [19-213/Y2C-CQ2R2L/3T(CY)]  33.02,119.06 270 top
Q1  [BC847B,215]  31.75,42.55 90 top
Q2  [BC847B,215]  31.75,47.62 270 top
Q3  [BC847B,215]  67.31,47.62 270 top
Q4  [BC847B,215]  67.31,42.55 90 top
Q5  [BC847B,215]  102.87,47.62 270 top
Q6  [BC847B,215]  102.87,42.55 90 top
Q7  [BC847B,215]  138.43,47.62 270 top
Q8  [BC847B,215]  138.43,42.55 90 top
Q9  [BC847B,215]  173.99,47.62 270 top
Q10  [BC847B,215]  173.99,42.55 90 top
Q11  [BC847B,215]  173.99,131.44 270 top
Q12  [BC847B,215]  173.99,126.36 90 top
Q13  [BC847B,215]  138.43,131.44 270 top
Q14  [BC847B,215]  138.43,126.36 90 top
Q15  [BC847B,215]  102.87,131.44 270 top
Q16  [BC847B,215]  102.87,126.36 90 top
Q17  [BC847B,215]  67.31,131.44 270 top
Q18  [BC847B,215]  67.31,126.36 90 top
Q19  [BC847B,215]  31.75,131.44 270 top
Q20  [BC847B,215]  31.75,126.36 90 top
R1  12K  [R0402]  18.41,31.75 90 top
R2  12K  [R0402]  31.11,31.75 90 top
R3  5K1  [R0402]  21.59,35.24 270 top
R4  27R  [R0402]  24.13,35.24 90 top
R5  27R  [R0402]  25.4,35.24 90 top
R6  5K1  [R0402]  27.94,35.24 270 top
R7  2K2  [R0402]  15.88,37.78 270 top
R8  2K2  [R0402]  31.75,38.42 270 top
R9  12K  [R0402]  33.02,38.42 270 top
R10  47K  [R0402]  29.84,38.1 180 top
R11  24K  [R0402]  29.84,39.37 0 top
R12  12K  [R0402]  29.84,40.64 180 top
R13  12K  [R0402]  30.8,45.09 90 top
R14  12K  [R0402]  32.7,45.09 270 top
R15  27R  [R0402]  59.69,35.24 90 top
R16  27R  [R0402]  60.96,35.24 90 top
R17  5K1  [R0402]  57.15,35.24 270 top
R18  5K1  [R0402]  63.5,35.24 270 top
R19  12K  [R0402]  53.98,31.75 90 top
R20  12K  [R0402]  66.67,31.75 90 top
R21  12K  [R0402]  68.58,38.42 270 top
R22  2K2  [R0402]  51.44,37.78 270 top
R23  2K2  [R0402]  67.31,38.42 270 top
R24  12K  [R0402]  66.36,45.09 90 top
R25  12K  [R0402]  68.26,45.09 270 top
R26  12K  [R0402]  65.41,40.64 180 top
R27  24K  [R0402]  65.41,39.37 0 top
R28  47K  [R0402]  65.41,38.1 180 top
R29  27R  [R0402]  95.25,35.24 90 top
R30  27R  [R0402]  96.52,35.24 90 top
R31  5K1  [R0402]  92.71,35.24 270 top
R32  5K1  [R0402]  99.06,35.24 270 top
R33  12K  [R0402]  89.53,31.75 90 top
R34  12K  [R0402]  102.23,31.75 90 top
R35  12K  [R0402]  104.14,38.42 270 top
R36  2K2  [R0402]  87,37.78 270 top
R37  2K2  [R0402]  102.87,38.42 270 top
R38  12K  [R0402]  101.92,45.09 90 top
R39  12K  [R0402]  103.82,45.09 270 top
R40  12K  [R0402]  100.97,40.64 180 top
R41  24K  [R0402]  100.97,39.37 0 top
R42  47K  [R0402]  100.97,38.1 180 top
R43  27R  [R0402]  130.81,35.24 90 top
R44  27R  [R0402]  132.08,35.24 90 top
R45  5K1  [R0402]  128.27,35.24 270 top
R46  5K1  [R0402]  134.62,35.24 270 top
R47  12K  [R0402]  125.09,31.75 90 top
R48  12K  [R0402]  137.79,31.75 90 top
R49  12K  [R0402]  139.7,38.42 270 top
R50  2K2  [R0402]  122.56,37.78 270 top
R51  2K2  [R0402]  138.43,38.42 270 top
R52  12K  [R0402]  137.48,45.09 90 top
R53  12K  [R0402]  139.38,45.09 270 top
R54  12K  [R0402]  136.53,40.64 180 top
R55  24K  [R0402]  136.53,39.37 0 top
R56  47K  [R0402]  136.53,38.1 180 top
R57  27R  [R0402]  166.37,35.24 90 top
R58  27R  [R0402]  167.64,35.24 90 top
R59  5K1  [R0402]  163.83,35.24 270 top
R60  5K1  [R0402]  170.18,35.24 270 top
R61  12K  [R0402]  160.66,31.75 90 top
R62  12K  [R0402]  173.35,31.75 90 top
R63  12K  [R0402]  175.26,38.42 270 top
R64  2K2  [R0402]  158.12,37.78 270 top
R65  2K2  [R0402]  173.99,38.42 270 top
R66  12K  [R0402]  173.04,45.09 90 top
R67  12K  [R0402]  174.94,45.09 270 top
R68  12K  [R0402]  172.09,40.64 180 top
R69  24K  [R0402]  172.09,39.37 0 top
R70  47K  [R0402]  172.09,38.1 180 top
R71  27R  [R0402]  166.37,119.06 90 top
R72  27R  [R0402]  167.64,119.06 90 top
R73  5K1  [R0402]  163.83,119.06 270 top
R74  5K1  [R0402]  170.18,119.06 270 top
R75  12K  [R0402]  160.66,115.57 90 top
R76  12K  [R0402]  173.35,115.57 90 top
R77  12K  [R0402]  175.26,122.24 270 top
R78  2K2  [R0402]  158.12,121.6 270 top
R79  2K2  [R0402]  173.99,122.24 270 top
R80  12K  [R0402]  173.04,128.91 90 top
R81  12K  [R0402]  174.94,128.91 270 top
R82  12K  [R0402]  172.09,124.46 180 top
R83  24K  [R0402]  172.09,123.19 0 top
R84  47K  [R0402]  172.09,121.92 180 top
R85  27R  [R0402]  130.81,119.06 90 top
R86  27R  [R0402]  132.08,119.06 90 top
R87  5K1  [R0402]  128.27,119.06 270 top
R88  5K1  [R0402]  134.62,119.06 270 top
R89  12K  [R0402]  125.09,115.57 90 top
R90  12K  [R0402]  137.79,115.57 90 top
R91  12K  [R0402]  139.7,122.24 270 top
R92  2K2  [R0402]  122.56,121.6 270 top
R93  2K2  [R0402]  138.43,122.24 270 top
R94  12K  [R0402]  137.48,128.91 90 top
R95  12K  [R0402]  139.38,128.91 270 top
R96  12K  [R0402]  136.53,124.46 180 top
R97  24K  [R0402]  136.53,123.19 0 top
R98  47K  [R0402]  136.53,121.92 180 top
R99  27R  [R0402]  95.25,119.06 90 top
R100  27R  [R0402]  96.52,119.06 90 top
R101  5K1  [R0402]  92.71,119.06 270 top
R102  5K1  [R0402]  99.06,119.06 270 top
R103  12K  [R0402]  89.53,115.57 90 top
R104  12K  [R0402]  102.23,115.57 90 top
R105  12K  [R0402]  104.14,122.24 270 top
R106  2K2  [R0402]  87,121.6 270 top
R107  2K2  [R0402]  102.87,122.24 270 top
R108  12K  [R0402]  101.92,128.91 90 top
R109  12K  [R0402]  103.82,128.91 270 top
R110  12K  [R0402]  100.97,124.46 180 top
R111  24K  [R0402]  100.97,123.19 0 top
R112  47K  [R0402]  100.97,121.92 180 top
R113  27R  [R0402]  59.69,119.06 90 top
R114  27R  [R0402]  60.96,119.06 90 top
R115  5K1  [R0402]  57.15,119.06 270 top
R116  5K1  [R0402]  63.5,119.06 270 top
R117  12K  [R0402]  53.98,115.57 90 top
R118  12K  [R0402]  66.67,115.57 90 top
R119  12K  [R0402]  68.58,122.24 270 top
R120  2K2  [R0402]  51.44,121.6 270 top
R121  2K2  [R0402]  67.31,122.24 270 top
R122  12K  [R0402]  66.36,128.91 90 top
R123  12K  [R0402]  68.26,128.91 270 top
R124  12K  [R0402]  65.41,124.46 180 top
R125  24K  [R0402]  65.41,123.19 0 top
R126  47K  [R0402]  65.41,121.92 180 top
R127  27R  [R0402]  24.13,119.06 90 top
R128  27R  [R0402]  25.4,119.06 90 top
R129  5K1  [R0402]  21.59,119.06 270 top
R130  5K1  [R0402]  27.94,119.06 270 top
R131  12K  [R0402]  18.41,115.57 90 top
R132  12K  [R0402]  31.11,115.57 90 top
R133  12K  [R0402]  33.02,122.24 270 top
R134  2K2  [R0402]  15.88,121.6 270 top
R135  2K2  [R0402]  31.75,122.24 270 top
R136  12K  [R0402]  30.8,128.91 90 top
R137  12K  [R0402]  32.7,128.91 270 top
R138  12K  [R0402]  29.84,124.46 180 top
R139  24K  [R0402]  29.84,123.19 0 top
R140  47K  [R0402]  29.84,121.92 180 top
SW1  [K2-1808SN-A4SW-01]  17.46,27.62 270 top
SW2  [K2-1808SN-A4SW-01]  32.07,27.62 90 top
SW3  [K2-1808SN-A4SW-01]  53.02,27.62 270 top
SW4  [K2-1808SN-A4SW-01]  67.63,27.62 90 top
SW5  [K2-1808SN-A4SW-01]  88.58,27.62 270 top
SW6  [K2-1808SN-A4SW-01]  103.19,27.62 90 top
SW7  [K2-1808SN-A4SW-01]  124.14,27.62 270 top
SW8  [K2-1808SN-A4SW-01]  138.75,27.62 90 top
SW9  [K2-1808SN-A4SW-01]  159.7,27.62 270 top
SW10  [K2-1808SN-A4SW-01]  174.31,27.62 90 top
SW11  [K2-1808SN-A4SW-01]  159.7,111.44 270 top
SW12  [K2-1808SN-A4SW-01]  174.31,111.44 90 top
SW13  [K2-1808SN-A4SW-01]  124.14,111.44 270 top
SW14  [K2-1808SN-A4SW-01]  138.75,111.44 90 top
SW15  [K2-1808SN-A4SW-01]  88.58,111.44 270 top
SW16  [K2-1808SN-A4SW-01]  103.19,111.44 90 top
SW17  [K2-1808SN-A4SW-01]  53.02,111.44 270 top
SW18  [K2-1808SN-A4SW-01]  67.63,111.44 90 top
SW19  [K2-1808SN-A4SW-01]  17.46,111.44 270 top
SW20  [K2-1808SN-A4SW-01]  32.07,111.44 90 top
TZ1  [LXES15AAA1-153]  30.48,35.24 270 top
TZ2  [LXES15AAA1-153]  66.04,35.24 270 top
TZ3  [LXES15AAA1-153]  101.6,35.24 270 top
TZ4  [LXES15AAA1-153]  137.16,35.24 270 top
TZ5  [LXES15AAA1-153]  172.72,35.24 270 top
TZ6  [LXES15AAA1-153]  172.72,119.06 270 top
TZ7  [LXES15AAA1-153]  137.16,119.06 270 top
TZ8  [LXES15AAA1-153]  101.6,119.06 270 top
TZ9  [LXES15AAA1-153]  66.04,119.06 270 top
TZ10  [LXES15AAA1-153]  30.48,119.06 270 top
U1  ESP32-S3-WROOM  [ESP32-S3-WROOM]  24.77,63.18 270 top
U2  CP2102N-A02-GQFN28R  [CP2102N-A02-GQFN28R]  24.77,39.37 90 top
U3  LM1117MPX-3.3/NOPB  [LM1117MPX-3.3/NOPB]  24.77,46.04 180 top
U4  LM1117MPX-3.3/NOPB  [LM1117MPX-3.3/NOPB]  60.33,46.04 180 top
U5  ESP32-S3-WROOM  [ESP32-S3-WROOM]  60.33,63.18 270 top
U6  CP2102N-A02-GQFN28R  [CP2102N-A02-GQFN28R]  60.33,39.37 90 top
U7  LM1117MPX-3.3/NOPB  [LM1117MPX-3.3/NOPB]  95.89,46.04 180 top
U8  ESP32-S3-WROOM  [ESP32-S3-WROOM]  95.89,63.18 270 top
U9  CP2102N-A02-GQFN28R  [CP2102N-A02-GQFN28R]  95.89,39.37 90 top
U10  LM1117MPX-3.3/NOPB  [LM1117MPX-3.3/NOPB]  131.44,46.04 180 top
U11  ESP32-S3-WROOM  [ESP32-S3-WROOM]  131.44,63.18 270 top
U12  CP2102N-A02-GQFN28R  [CP2102N-A02-GQFN28R]  131.44,39.37 90 top
U13  LM1117MPX-3.3/NOPB  [LM1117MPX-3.3/NOPB]  167,46.04 180 top
U14  ESP32-S3-WROOM  [ESP32-S3-WROOM]  167,63.18 270 top
U15  CP2102N-A02-GQFN28R  [CP2102N-A02-GQFN28R]  167,39.37 90 top
U16  LM1117MPX-3.3/NOPB  [LM1117MPX-3.3/NOPB]  167,129.86 180 top
U17  ESP32-S3-WROOM  [ESP32-S3-WROOM]  167,147 270 top
U18  CP2102N-A02-GQFN28R  [CP2102N-A02-GQFN28R]  167,123.19 90 top
U19  LM1117MPX-3.3/NOPB  [LM1117MPX-3.3/NOPB]  131.44,129.86 180 top
U20  ESP32-S3-WROOM  [ESP32-S3-WROOM]  131.44,147 270 top
U21  CP2102N-A02-GQFN28R  [CP2102N-A02-GQFN28R]  131.44,123.19 90 top
U22  LM1117MPX-3.3/NOPB  [LM1117MPX-3.3/NOPB]  95.89,129.86 180 top
U23  ESP32-S3-WROOM  [ESP32-S3-WROOM]  95.89,147 270 top
U24  CP2102N-A02-GQFN28R  [CP2102N-A02-GQFN28R]  95.89,123.19 90 top
U25  LM1117MPX-3.3/NOPB  [LM1117MPX-3.3/NOPB]  60.33,129.86 180 top
U26  ESP32-S3-WROOM  [ESP32-S3-WROOM]  60.33,147 270 top
U27  CP2102N-A02-GQFN28R  [CP2102N-A02-GQFN28R]  60.33,123.19 90 top
U28  LM1117MPX-3.3/NOPB  [LM1117MPX-3.3/NOPB]  24.77,129.86 180 top
U29  ESP32-S3-WROOM  [ESP32-S3-WROOM]  24.77,147 270 top
U30  CP2102N-A02-GQFN28R  [CP2102N-A02-GQFN28R]  24.77,123.19 90 top
USB1  TYPE-C-31-M-12  [TYPE-C-31-M-12]  24.77,28.57 180 top
USB2  TYPE-C-31-M-12  [TYPE-C-31-M-12]  60.33,28.57 180 top
USB3  TYPE-C-31-M-12  [TYPE-C-31-M-12]  95.89,28.57 180 top
USB4  TYPE-C-31-M-12  [TYPE-C-31-M-12]  131.44,28.57 180 top
USB5  TYPE-C-31-M-12  [TYPE-C-31-M-12]  167,28.57 180 top
USB6  TYPE-C-31-M-12  [TYPE-C-31-M-12]  167,112.39 180 top
USB7  TYPE-C-31-M-12  [TYPE-C-31-M-12]  131.44,112.39 180 top
USB8  TYPE-C-31-M-12  [TYPE-C-31-M-12]  95.89,112.39 180 top
USB9  TYPE-C-31-M-12  [TYPE-C-31-M-12]  60.33,112.39 180 top
USB10  TYPE-C-31-M-12  [TYPE-C-31-M-12]  24.77,112.39 180 top
ZFC1  FIDUCIAL1X2  [FIDUCIAL-1X2]  7.62,165.1 0 top
ZFC2  FIDUCIAL1X2  [FIDUCIAL-1X2]  7.62,19.05 0 top
ZFC3  FIDUCIAL1X2  [FIDUCIAL-1X2]  184.15,19.05 0 top
ZFD1  FIDUCIAL1X2  [FIDUCIAL-1X2]  15.2,74.3 0 top
ZFD2  FIDUCIAL1X2  [FIDUCIAL-1X2]  21.91,26.99 0 top
ZFD3  FIDUCIAL1X2  [FIDUCIAL-1X2]  27.62,26.99 0 top
ZFD4  FIDUCIAL1X2  [FIDUCIAL-1X2]  50.76,74.3 0 top
ZFD5  FIDUCIAL1X2  [FIDUCIAL-1X2]  57.47,26.99 0 top
ZFD6  FIDUCIAL1X2  [FIDUCIAL-1X2]  63.18,26.99 0 top
ZFD7  FIDUCIAL1X2  [FIDUCIAL-1X2]  86.32,74.3 0 top
ZFD8  FIDUCIAL1X2  [FIDUCIAL-1X2]  93.03,26.99 0 top
ZFD9  FIDUCIAL1X2  [FIDUCIAL-1X2]  98.74,26.99 0 top
ZFD10  FIDUCIAL1X2  [FIDUCIAL-1X2]  121.88,74.3 0 top
ZFD11  FIDUCIAL1X2  [FIDUCIAL-1X2]  128.59,26.99 0 top
ZFD12  FIDUCIAL1X2  [FIDUCIAL-1X2]  134.3,26.99 0 top
ZFD13  FIDUCIAL1X2  [FIDUCIAL-1X2]  157.44,74.3 0 top
ZFD14  FIDUCIAL1X2  [FIDUCIAL-1X2]  164.15,26.99 0 top
ZFD15  FIDUCIAL1X2  [FIDUCIAL-1X2]  169.86,26.99 0 top
ZFD16  FIDUCIAL1X2  [FIDUCIAL-1X2]  157.44,158.12 0 top
ZFD17  FIDUCIAL1X2  [FIDUCIAL-1X2]  164.15,110.81 0 top
ZFD18  FIDUCIAL1X2  [FIDUCIAL-1X2]  169.86,110.81 0 top
ZFD19  FIDUCIAL1X2  [FIDUCIAL-1X2]  121.88,158.12 0 top
ZFD20  FIDUCIAL1X2  [FIDUCIAL-1X2]  128.59,110.81 0 top
ZFD21  FIDUCIAL1X2  [FIDUCIAL-1X2]  134.3,110.81 0 top
ZFD22  FIDUCIAL1X2  [FIDUCIAL-1X2]  86.32,158.12 0 top
ZFD23  FIDUCIAL1X2  [FIDUCIAL-1X2]  93.03,110.81 0 top
ZFD24  FIDUCIAL1X2  [FIDUCIAL-1X2]  98.74,110.81 0 top
ZFD25  FIDUCIAL1X2  [FIDUCIAL-1X2]  50.76,158.12 0 top
ZFD26  FIDUCIAL1X2  [FIDUCIAL-1X2]  57.47,110.81 0 top
ZFD27  FIDUCIAL1X2  [FIDUCIAL-1X2]  63.18,110.81 0 top
ZFD28  FIDUCIAL1X2  [FIDUCIAL-1X2]  15.2,158.12 0 top
ZFD29  FIDUCIAL1X2  [FIDUCIAL-1X2]  21.91,110.81 0 top
ZFD30  FIDUCIAL1X2  [FIDUCIAL-1X2]  27.62,110.81 0 top
ZL1  LAMLEOI_LOGO_3  [LAMLEOI_LOGO_3]  22.78,52.7 0 top
ZL2  LAMLEOI_LOGO_3  [LAMLEOI_LOGO_3]  26.75,52.7 0 bottom
ZL3  LAMLEOI_LOGO_3  [LAMLEOI_LOGO_3]  58.34,52.7 0 top
ZL4  LAMLEOI_LOGO_3  [LAMLEOI_LOGO_3]  62.31,52.7 0 bottom
ZL5  LAMLEOI_LOGO_3  [LAMLEOI_LOGO_3]  93.9,52.7 0 top
ZL6  LAMLEOI_LOGO_3  [LAMLEOI_LOGO_3]  97.87,52.7 0 bottom
ZL7  LAMLEOI_LOGO_3  [LAMLEOI_LOGO_3]  129.46,52.7 0 top
ZL8  LAMLEOI_LOGO_3  [LAMLEOI_LOGO_3]  133.43,52.7 0 bottom
ZL9  LAMLEOI_LOGO_3  [LAMLEOI_LOGO_3]  165.02,52.7 0 top
ZL10  LAMLEOI_LOGO_3  [LAMLEOI_LOGO_3]  168.99,52.7 0 bottom
ZL11  LAMLEOI_LOGO_3  [LAMLEOI_LOGO_3]  165.02,136.53 0 top
ZL12  LAMLEOI_LOGO_3  [LAMLEOI_LOGO_3]  168.99,136.53 0 bottom
ZL13  LAMLEOI_LOGO_3  [LAMLEOI_LOGO_3]  129.46,136.53 0 top
ZL14  LAMLEOI_LOGO_3  [LAMLEOI_LOGO_3]  133.43,136.53 0 bottom
ZL15  LAMLEOI_LOGO_3  [LAMLEOI_LOGO_3]  93.9,136.53 0 top
ZL16  LAMLEOI_LOGO_3  [LAMLEOI_LOGO_3]  97.87,136.53 0 bottom
ZL17  LAMLEOI_LOGO_3  [LAMLEOI_LOGO_3]  58.34,136.53 0 top
ZL18  LAMLEOI_LOGO_3  [LAMLEOI_LOGO_3]  62.31,136.53 0 bottom
ZL19  LAMLEOI_LOGO_3  [LAMLEOI_LOGO_3]  22.78,136.53 0 top
ZL20  LAMLEOI_LOGO_3  [LAMLEOI_LOGO_3]  26.75,136.53 0 bottom
ZLC1  LAMLEOI_LOGO_3  [LAMLEOI_LOGO_3]  93.9,164.47 0 top
ZLC2  LAMLEOI_LOGO_3  [LAMLEOI_LOGO_3]  97.87,164.47 0 bottom
ZLC3  LAMLEOI_LOGO_3  [LAMLEOI_LOGO_3]  93.9,16.83 0 top
ZLC4  LAMLEOI_LOGO_3  [LAMLEOI_LOGO_3]  97.87,16.83 0 bottom

## Library data of the parts
C1 C20 C33 C46 C59 C72 C85 C98 C111 C124 = lamloei_e77_GRM155R70J105KA12D; MANUFACTURER_PART_NUMBER: GRM155R70J105KA12D; VENDOR: Murata
C2 C3 C6-C8 C10 C11 C13 C16-C19 C22 C24-C26 C29-C32 C35 C37-C39 C42-C45 C48 C50-C52 C55-C58 C61 C63-C65 C68-C71 C74 C76-C78 C81-C84 C87 C89-C91 C94-C97 C100 C102-C104 C107-C110 C113 C115-C117 C120-C123 C126 C128-C130 CB2 CB4 CB6 CB8 CB10 CB12 CB14 CB16 CB18 CB20 = lamloei_e77_GCM155R71H104KE02D; MANUFACTURER_PART_NUMBER: GCM155R71H104KE02D; VENDOR: Murata
C4 C5 C14 C15 C27 C28 C40 C41 C53 C54 C66 C67 C79 C80 C92 C93 C105 C106 C118 C119 = lamloei_e77_GCM1555C1H470JA16D; MANUFACTURER_PART_NUMBER: GCM1555C1H470JA16D; VENDOR: Murata
C9 C12 C21 C23 C34 C36 C47 C49 C60 C62 C73 C75 C86 C88 C99 C101 C112 C114 C125 C127 CB1 CB3 CB5 CB7 CB9 CB11 CB13 CB15 CB17 CB19 = lamloei_e77_GCM21BR71H105KA03L; MANUFACTURER_PART_NUMBER: GCM21BR71H105KA03L; VENDOR: Murata
D1-D10 = lamloei_e77_PMEG4050EP_115; DESCRIPTION: Nexperia PMEG4050EP,115 SMT Schottky Diode, 40V 5A, 2-Pin SOD-128; HEIGHT: 1.1mm; MANUFACTURER_NAME: Nexperia; MANUFACTURER_PART_NUMBER: PMEG4050EP,115; RS_PART_NUMBER: 7805405P; RS_PRICE-STOCK: http://uk.rs-online.com/web/p/products/7805405P
F1-F10 = lamloei_e77_mf-nsmf050-2-noretrict; DATASHEET: https://datasheet.lcsc.com/lcsc/1809212037_BOURNS-MF-NSMF050-2_C75464.pdf; DESCRIPTIONS: 13.2V 1A 1206 PTC Resettable Fuses; LCSC_PART: C75464; MANUFACTURER: BOURNS; MANUFACTURER_PART_NUMBER: MF-NSMF050-2; OPERATION_TEMPERATURE: -40°C ~ +85°C; OPERATION_TEMPERATURE_HIGH: +85°C; OPERATION_TEMPERATURE_LOW: -40°C; PACKAGE: 1206; PCBA_COST: Extended
J1 J7 J13 J19 J25 J31 J37 J43 J49 J55 = lamloei_e77_HEADER-120A
J2 J8 J14 J20 J26 J32 J38 J44 J50 J56 = lamloei_e77_HEADER-120B
J3 J4 J9 J10 J15 J16 J21 J22 J27 J28 J33 J34 J39 J40 J45 J46 J51 J52 J57 J58 JB2 JB4 JB6 JB8 JB10 JB12 JB14 JB16 JB18 JB20 = lamloei_e77_HEADER-101-SMD
J5 J6 J11 J12 J17 J18 J23 J24 J29 J30 J35 J36 J41 J42 J47 J48 J53 J54 J59 J60 = lamloei_e77_HEADER-120D
JB1 JB3 JB5 JB7 JB9 JB11 JB13 JB15 JB17 JB19 = lamloei_e77_a2012wr-s-4p
LED1 LED3 LED5 LED7 LED9 LED11 LED13 LED15 LED17 LED19 = lamloei_e77_19-217BHC-ZL1M2RY3T; MANUFACTURER_PART_NUMBER: 19-217BHC-ZL1M2RY3T; VENDOR: Everlight Elec
LED2 LED4 LED6 LED8 LED10 LED12 LED14 LED16 LED18 LED20 = lamloei_e77_19-213Y2C-CQ2R2L3T(CY); MANUFACTURER_PART_NUMBER: 19-213/Y2C-CQ2R2L/3T(CY); VENDOR: Everlight Elec
Q1-Q20 = lamloei_e77_bc847b_215; AVAILABILITY: In Stock; DESCRIPTION: Bipolar (BJT) Transistor NPN 45V 100mA 100MHz 300mW Surface Mount SOT-23-3 (TO-236); MF: ON Semiconductor; MP: BC847BLT3G; PACKAGE: SOT-23-3 ON Semiconductor; PRICE: None
R1 R2 R9 R12-R14 R19-R21 R24-R26 R33-R35 R38-R40 R47-R49 R52-R54 R61-R63 R66-R68 R75-R77 R80-R82 R89-R91 R94-R96 R103-R105 R108-R110 R117-R119 R122-R124 R131-R133 R136-R138 = lamloei_e77_rc0402fr-0712kl; DATASHEET: https://datasheet.lcsc.com/lcsc/1811081726_YAGEO-RC0402FR-0712KL_C114760.pdf; DESCRIPTIONS: 12kΩ ±1% 0.0625W ±100ppm/°C; DIELECTRIC: X7R; LCSC_PART: C114760; MANUFACTURER: YAGEO; MANUFACTURER_PART_NUMBER: RC0402FR-0712KL; OPERATION_POWER: 1/16W; OPERATION_TEMPERATURE: -55°C ~ +155°C; OPERATION_TEMPERATURE_HIGH: +155°C; OPERATION_TEMPERATURE_LOW: -55°C; PACKAGE: 0402; PCBA_COST: EXTENDED; RATED_VOLTAGE: 100VDC; RESISTANCE: 12kΩ; TOLERANCE: ±1%
R3 R6 R17 R18 R31 R32 R45 R46 R59 R60 R73 R74 R87 R88 R101 R102 R115 R116 R129 R130 = lamloei_e77_rc0402fr-075k1l; DATASHEET: https://datasheet.lcsc.com/lcsc/1809201112_YAGEO-RC0402FR-075K1L_C105872.pdf; DESCRIPTIONS: 5.1kΩ ±1% 0.0625W ±100ppm/°C; DIELECTRIC: X7R; LCSC_PART: C105872; MANUFACTURER: YAGEO; MANUFACTURER_PART_NUMBER: RC0402FR-075K1L; OPERATION_POWER: 1/16W; OPERATION_TEMPERATURE: -55°C ~ +155°C; OPERATION_TEMPERATURE_HIGH: +155°C; OPERATION_TEMPERATURE_LOW: -55°C; PACKAGE: 0402; PCBA_COST: EXTENDED; RATED_VOLTAGE: 100VDC; RESISTANCE: 5.1kΩ; TOLERANCE: ±1%
R4 R5 R15 R16 R29 R30 R43 R44 R57 R58 R71 R72 R85 R86 R99 R100 R113 R114 R127 R128 = lamloei_e77_rc0402fr-0727rl; DATASHEET: https://datasheet.lcsc.com/lcsc/1810241334_YAGEO-RC0402FR-0727RL_C138021.pdf; DESCRIPTIONS: 27Ω ±1% 0.0625W ±100ppm/°C; DIELECTRIC: X7R; LCSC_PART: C138021; MANUFACTURER: YAGEO; MANUFACTURER_PART_NUMBER: RC0402FR-0727RL; OPERATION_POWER: 1/16W; OPERATION_TEMPERATURE: -55°C ~ +155°C; OPERATION_TEMPERATURE_HIGH: +155°C; OPERATION_TEMPERATURE_LOW: -55°C; PACKAGE: 0402; PCBA_COST: EXTENDED; RATED_VOLTAGE: 100VDC; RESISTANCE: 27Ω; TOLERANCE: ±1%
R7 R8 R22 R23 R36 R37 R50 R51 R64 R65 R78 R79 R92 R93 R106 R107 R120 R121 R134 R135 = lamloei_e77_rc0402fr-072k2l; DATASHEET: https://datasheet.lcsc.com/lcsc/1809201112_YAGEO-RC0402FR-072K2L_C114762.pdf; DESCRIPTIONS: 2.2kΩ ±1% 0.0625W ±100ppm/°C; DIELECTRIC: X7R; LCSC_PART: C114762; MANUFACTURER: YAGEO; MANUFACTURER_PART_NUMBER: RC0402FR-072K2L; OPERATION_POWER: 1/16W; OPERATION_TEMPERATURE: -55°C ~ +155°C; OPERATION_TEMPERATURE_HIGH: +155°C; OPERATION_TEMPERATURE_LOW: -55°C; PACKAGE: 0402; PCBA_COST: EXTENDED; RATED_VOLTAGE: 100VDC; RESISTANCE: 2.2kΩ; TOLERANCE: ±1%
R10 R28 R42 R56 R70 R84 R98 R112 R126 R140 = lamloei_e77_rc0402fr-0747kl; DATASHEET: https://datasheet.lcsc.com/lcsc/1811011510_YAGEO-RC0402FR-0747KL_C93943.pdf; DESCRIPTIONS: 47kΩ ±1% 0.0625W ±100ppm/°C; DIELECTRIC: X7R; LCSC_PART: C93943; MANUFACTURER: YAGEO; MANUFACTURER_PART_NUMBER: RC0402FR-0747KL; OPERATION_POWER: 1/16W; OPERATION_TEMPERATURE: -55°C ~ +155°C; OPERATION_TEMPERATURE_HIGH: +155°C; OPERATION_TEMPERATURE_LOW: -55°C; PACKAGE: 0402; PCBA_COST: EXTENDED; RATED_VOLTAGE: 100VDC; RESISTANCE: 47kΩ; TOLERANCE: ±1%
R11 R27 R41 R55 R69 R83 R97 R111 R125 R139 = lamloei_e77_rc0402fr-0724kl; DATASHEET: https://datasheet.lcsc.com/lcsc/1810241334_YAGEO-RC0402FR-0724KL_C138026.pdf; DESCRIPTIONS: 24kΩ ±1% 0.0625W ±100ppm/°C; DIELECTRIC: X7R; LCSC_PART: C138026; MANUFACTURER: YAGEO; MANUFACTURER_PART_NUMBER: RC0402FR-0724KL; OPERATION_POWER: 1/16W; OPERATION_TEMPERATURE: -55°C ~ +155°C; OPERATION_TEMPERATURE_HIGH: +155°C; OPERATION_TEMPERATURE_LOW: -55°C; PACKAGE: 0402; PCBA_COST: EXTENDED; RATED_VOLTAGE: 100VDC; RESISTANCE: 24kΩ; TOLERANCE: ±1%
SW1-SW20 = lamloei_e77_K2-1808SN-A4SW-01; AVAILABILITY: In Stock; COMMENT: 4-1437565-2; CONFIGURATION_POLE-THROW: Single Pole - Single Throw; CONTACT_CURRENT_RATING: 50 mA; DESCRIPTION: Tactile Switch SPST-NO Top Actuated Surface Mount; EU_ROHS_COMPLIANCE: Compliant; MF: TE Connectivity; MP: 4-1437565-2; PACKAGE: None; PRICE: None
TZ1-TZ10 = lamloei_e77_lxes15aaa1-153; DATASHEET: https://datasheet.lcsc.com/lcsc/1811081617_Murata-Electronics-LXES15AAA1-153_C86141.pdf; DESCRIPTIONS: Bidirectional 4V 0402 Diodes - ESD; LCSC_PART: C86141; MANUFACTURER: Murata; MANUFACTURER_PART_NUMBER: LXES15AAA1-153; OPERATION_TEMPERATURE: -40°C ~ +85°C; OPERATION_TEMPERATURE_HIGH: +85°C; OPERATION_TEMPERATURE_LOW: -40°C; PACKAGE: 0402; PCBA_COST: EXTENDED; RATED_VOLTAGE: 4V
U1 U5 U8 U11 U14 U17 U20 U23 U26 U29 = lamloei_e77_ESP32-S3-WROOM-ANT; AVAILABILITY: Warning; DESCRIPTION: Module: combo; GPIO, I2C x2, I2S x2, SDIO, SPI x3, UART x3; 19.5dBm; MF: Olimex LTD; MP: ESP-WROOM-32; PACKAGE: Module Espressif Systems; PRICE: 4.57 USD
U2 U6 U9 U12 U15 U18 U21 U24 U27 U30 = lamloei_e77_cp2102n-a02-gqfn24r
U3 U4 U7 U10 U13 U16 U19 U22 U25 U28 = lamloei_e77_LM1117MPX-3.3_NOPB; AVAILABILITY: In Stock; DESCRIPTION: 800-mA 15-V linear voltage regulator 4-SOT-223 0 to 125; MF: Texas Instruments; MP: LM1117MPX-3.3/NOPB; PACKAGE: SOT-223-4 Texas Instruments; PRICE: None; PURCHASE-URL: https://pricing.snapeda.com/search/part/LM1117MPX-3.3/NOPB/?ref=eda
USB1-USB10 = _lamloei_e77_TYPE-C-31-M-12; AVAILABILITY: Unavailable; DESCRIPTION: USB Connectors 24 Receptacle 1 8.94*7.3mm RoHS; DIFFX: 1.75; DIFFY: -3.53; MF: HRO Electronics Co., Ltd.; MP: TYPE-C-31-M-12; PACKAGE: Package; PRICE: None
ZFC1-ZFC3 ZFD1-ZFD30 = SparkFun-Aesthetics
ZL1-ZL20 ZLC1-ZLC4 = lamloei_logo_3